# Altium PCB P1 - PCB.PcbDoc
Units mil, origin at the board's own origin, x right, y up, seen from the top; angles counter-clockwise.
Board outline 3000 x 3000 mil, 4 copper layers (TOP SIGNAL, POWER, GROUND, BOTTOM SIGNAL), stack 17.868 mil thick; 41 components, 31 nets, 163 pads, 33 vias.
Unrouted connection lines stored in the file: 1.
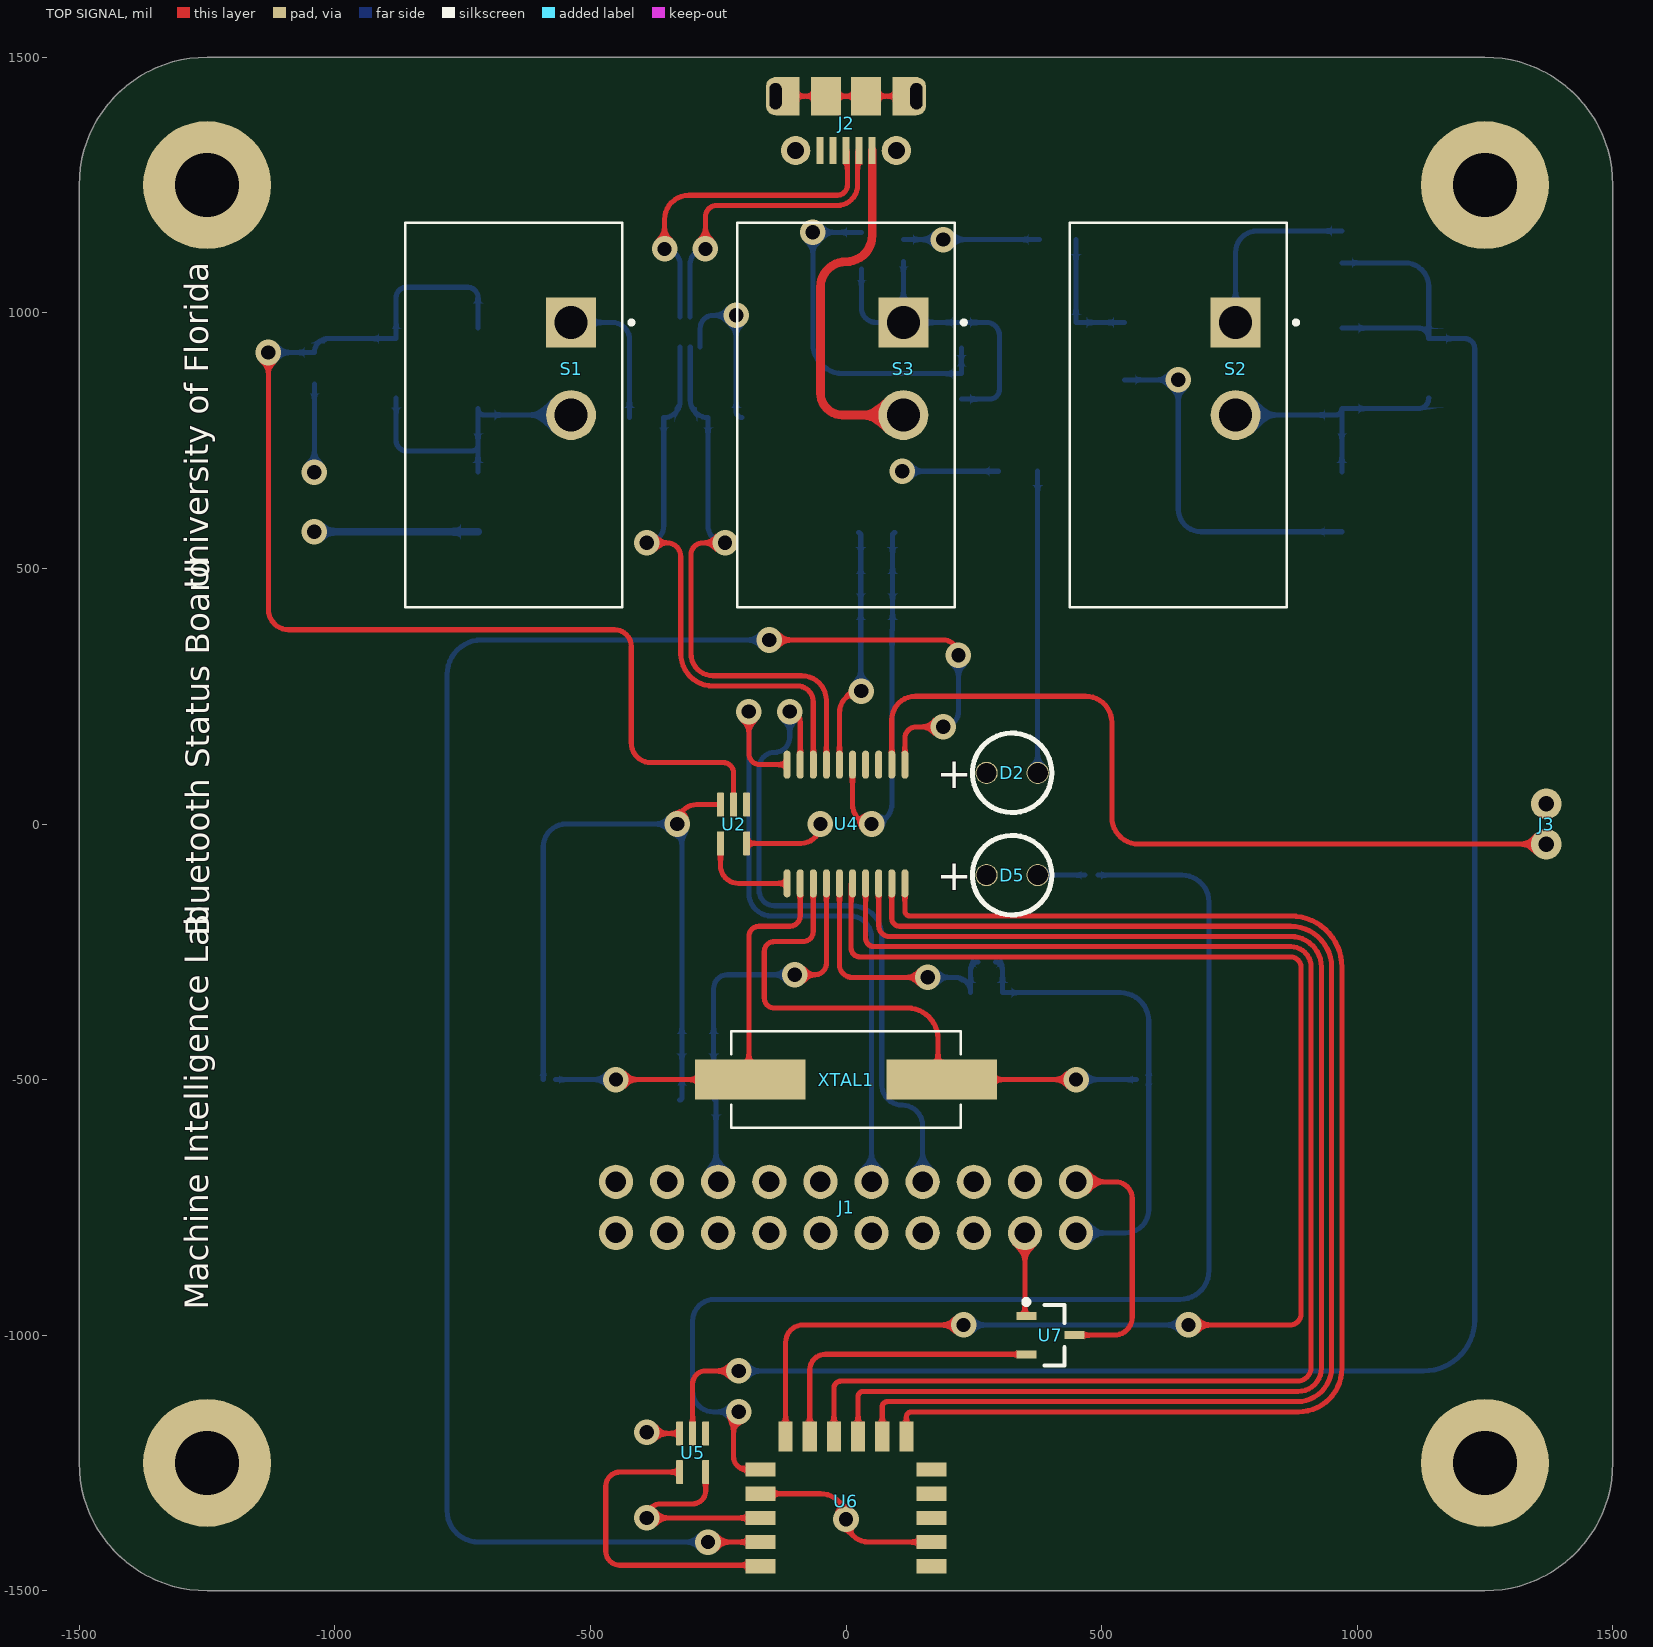
[diagram p0: TOP SIGNAL view]
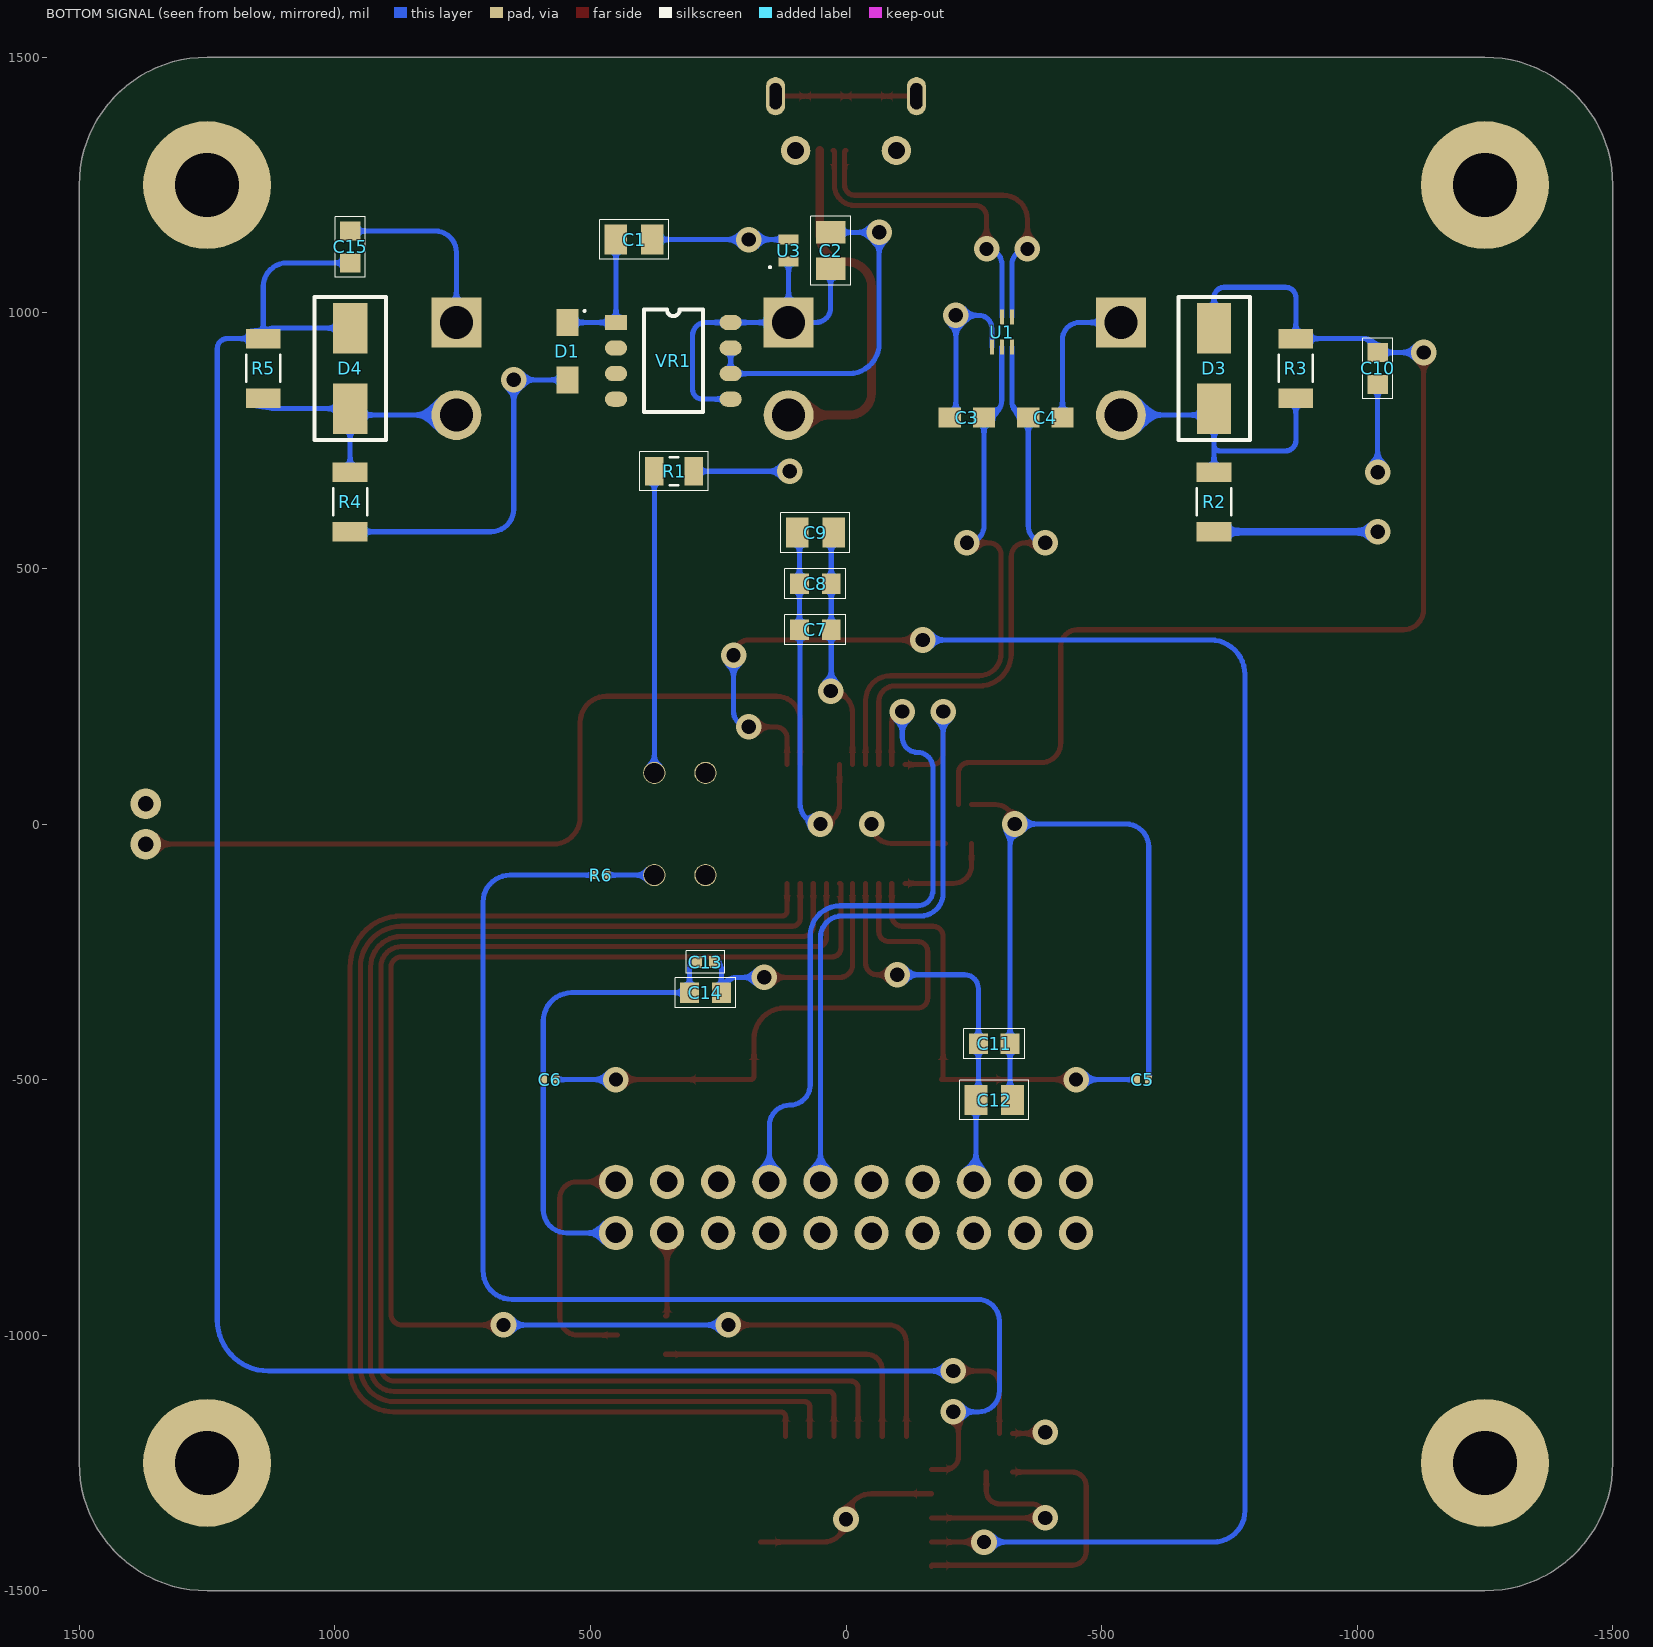
[diagram p1: BOTTOM SIGNAL view, seen from below]
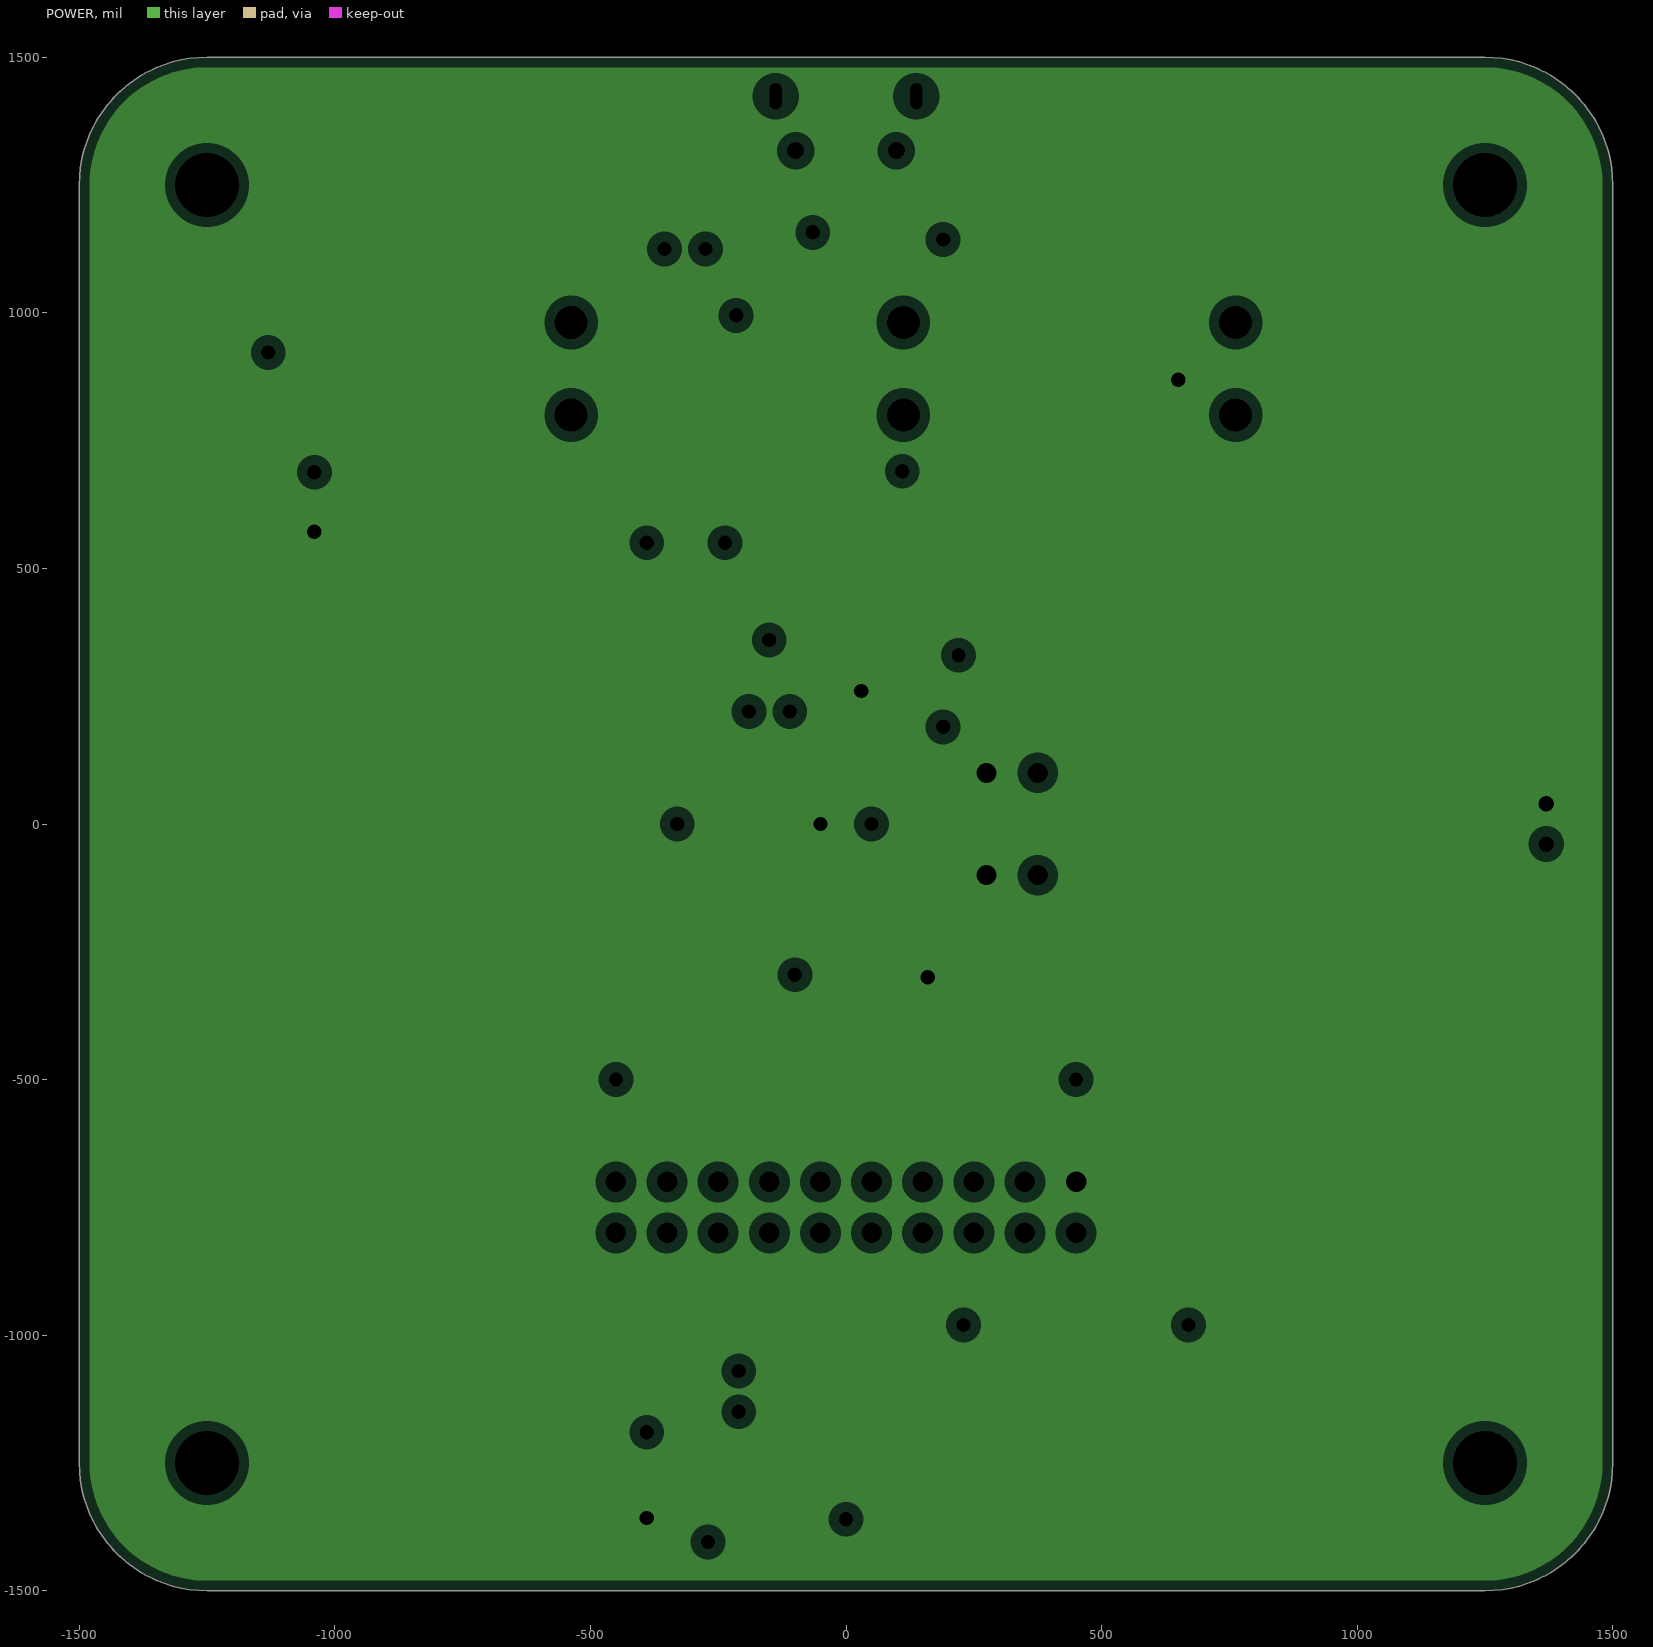
[diagram p2: POWER, clearances drawn from the general rule]
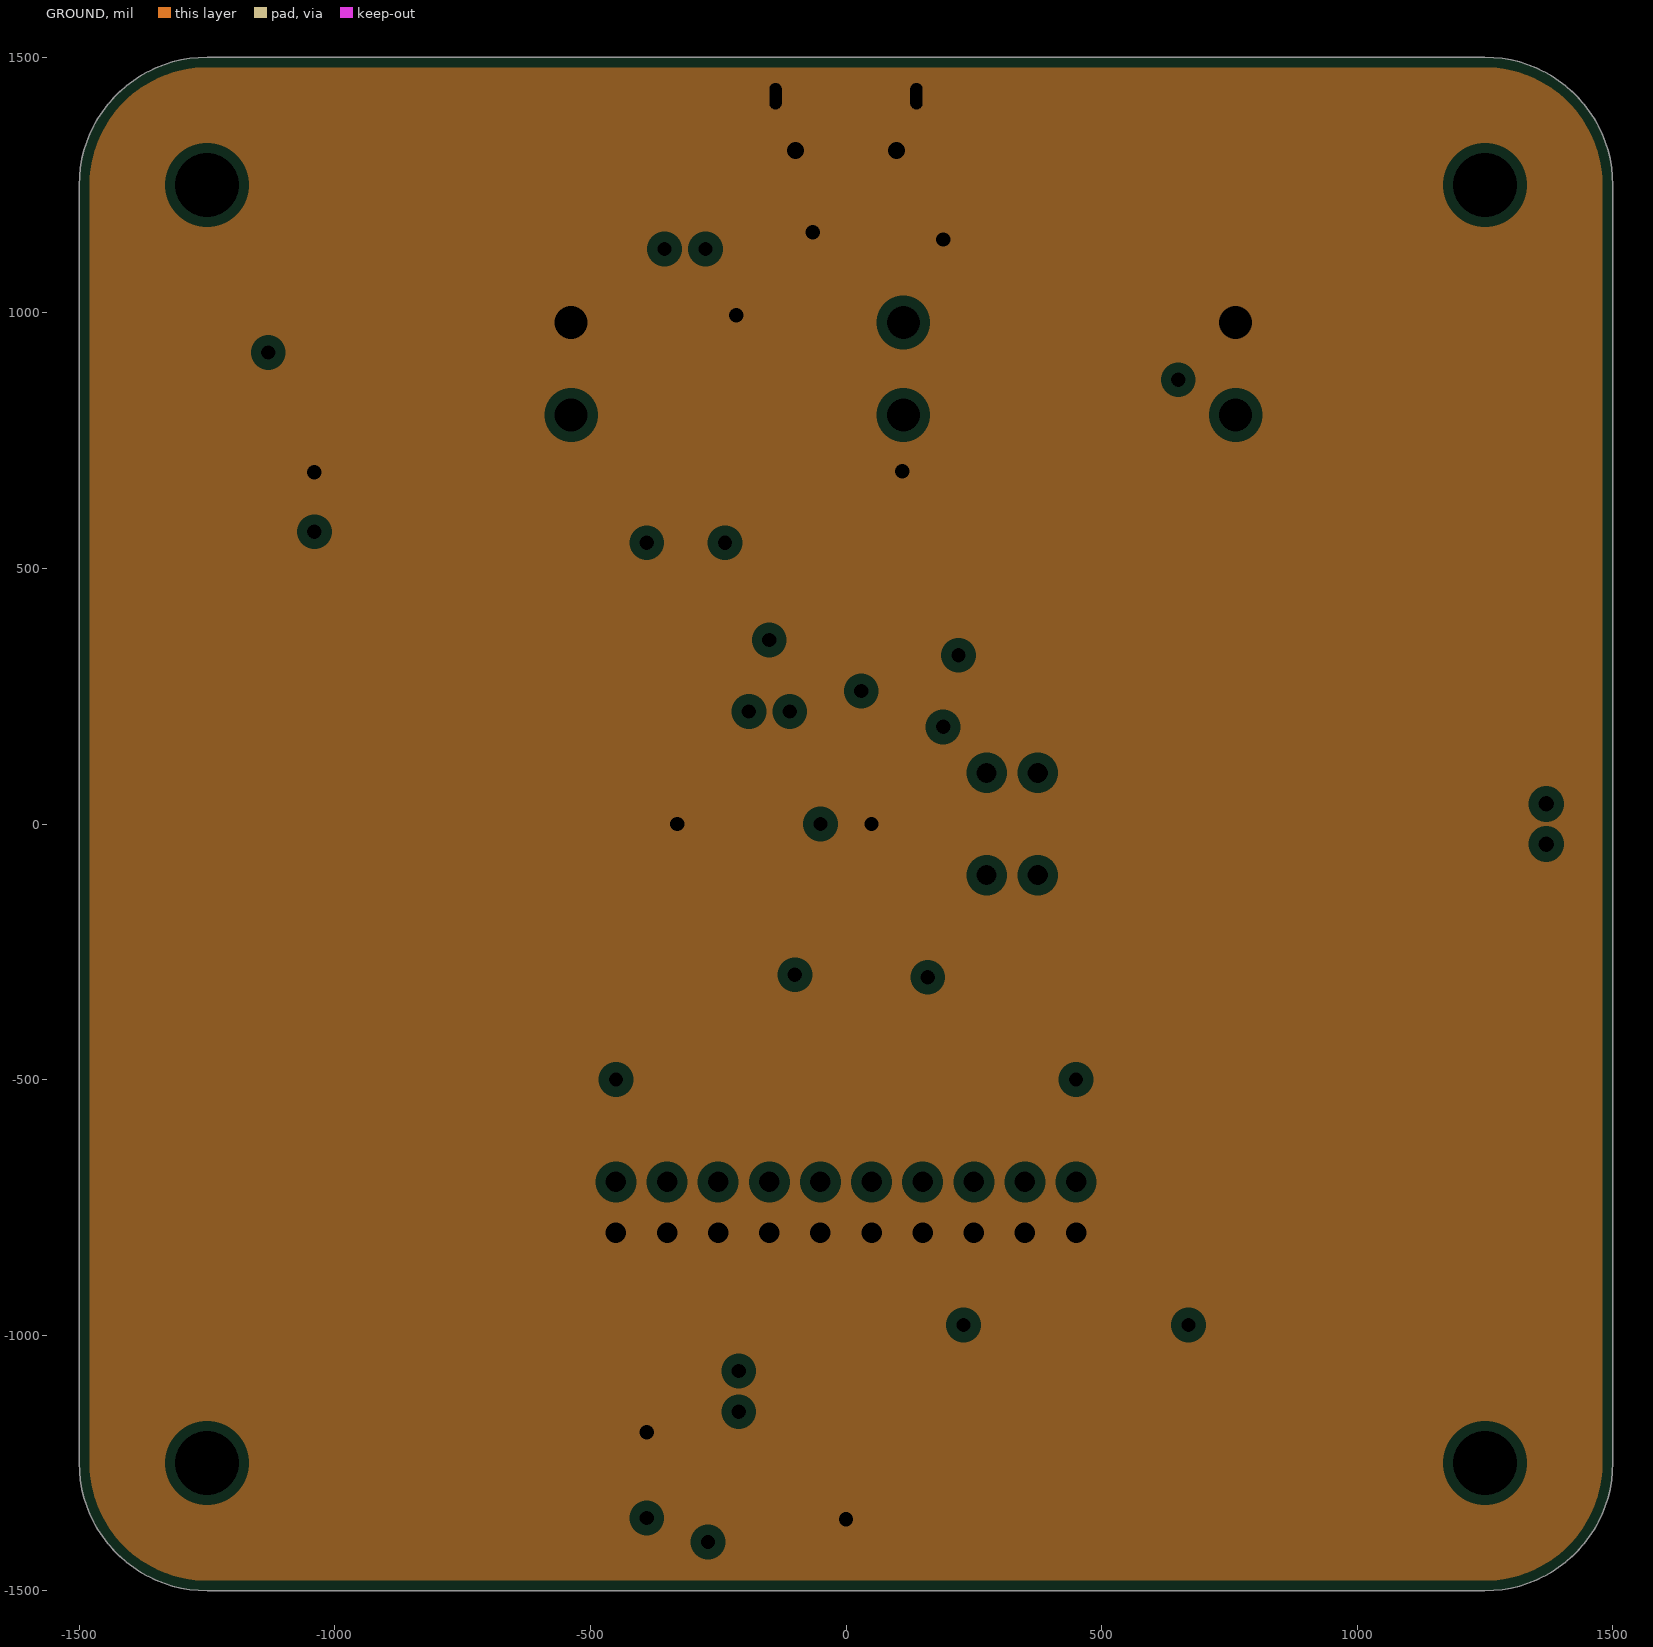
[diagram p3: GROUND, clearances drawn from the general rule]
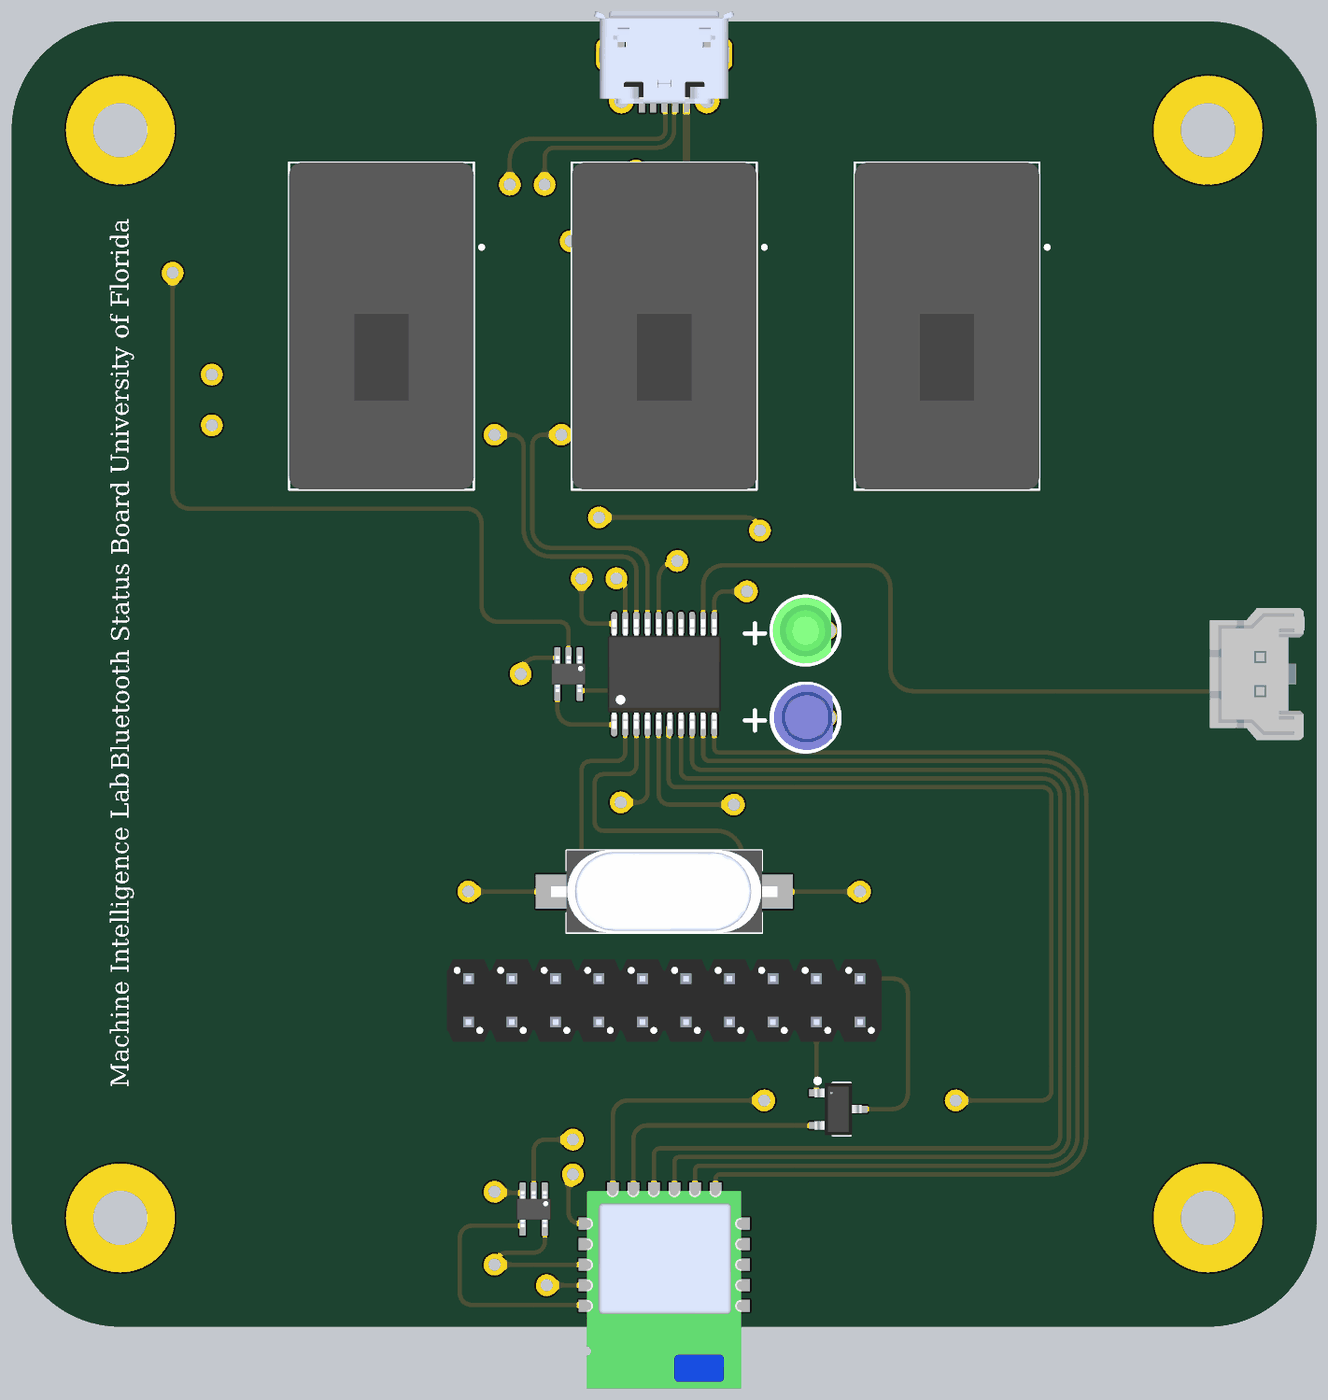
[diagram p4: 3D render of the assembled board from above, using the file's embedded part models]
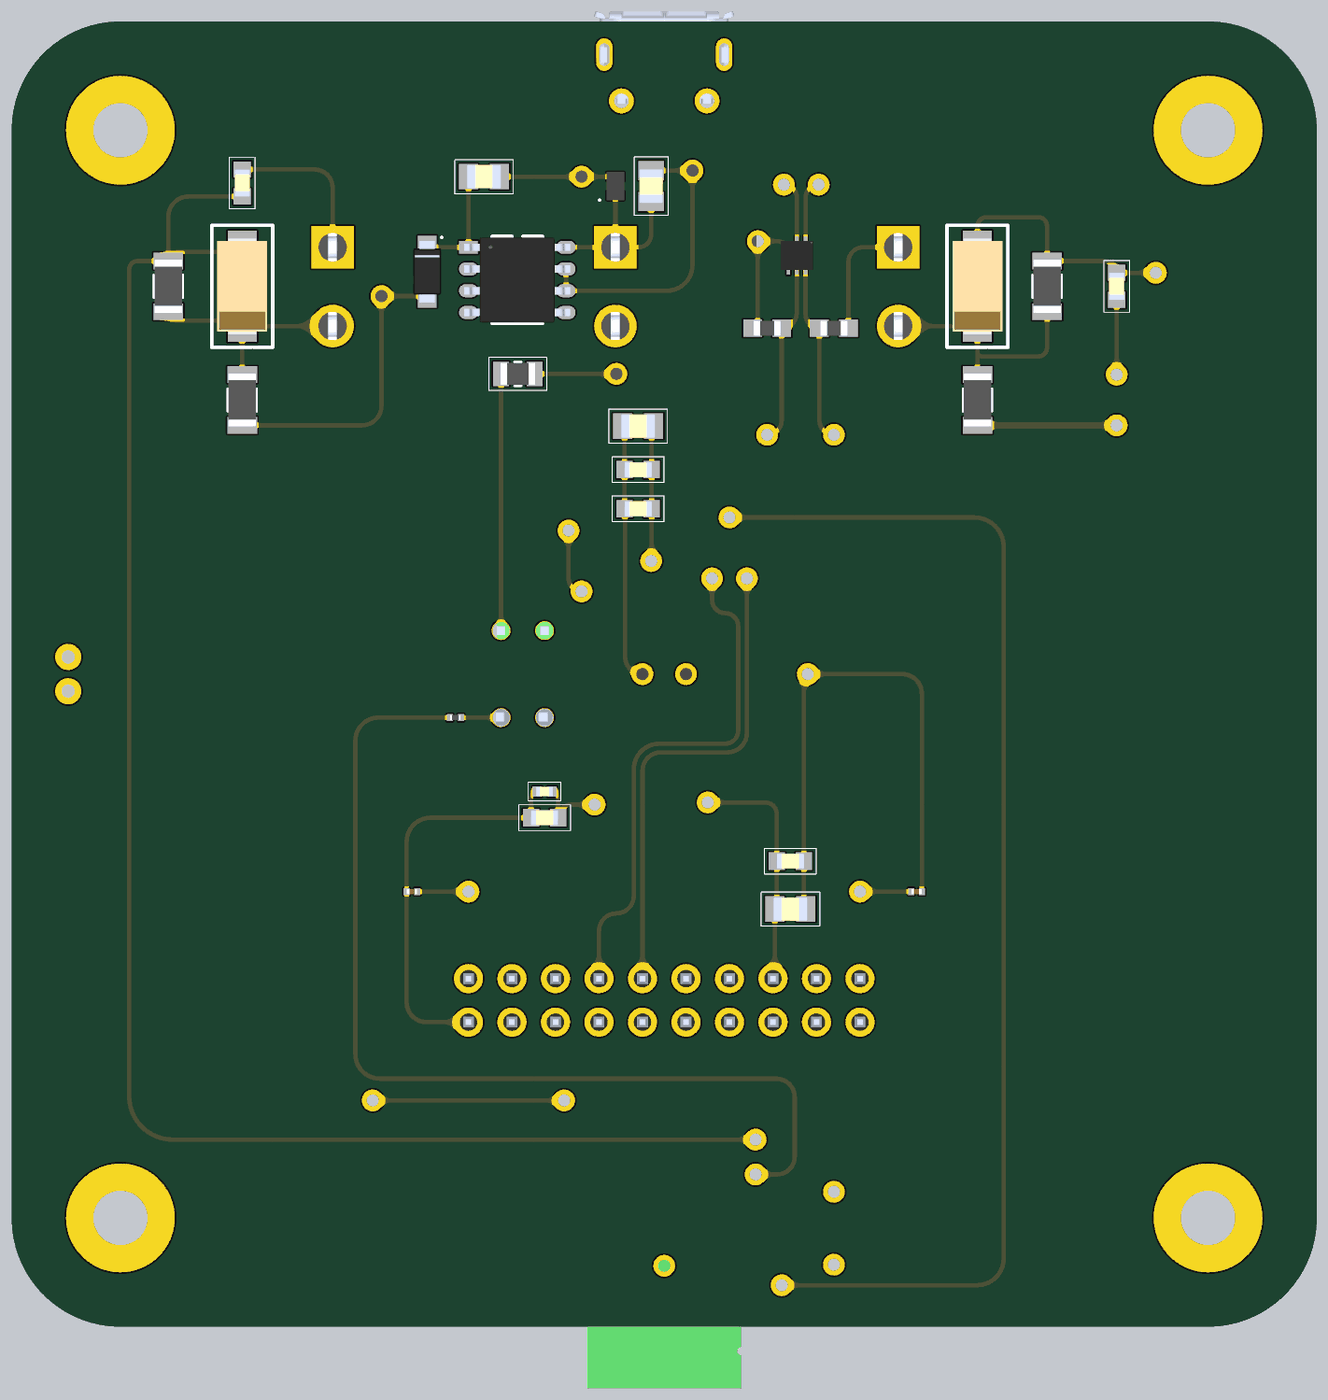
[diagram p5: 3D render of the assembled board from below, using the file's embedded part models]

## Layer stack, top to bottom
Top Solder: solder mask 1, SM-002, Dk 4
TOP SIGNAL: signal copper 1.378
Dielectric 2: prepreg 2.8, PP-006, Dk 4.1
POWER: plane copper 2.7559, net VCC
Dielectric 1: core 4, Core-009, Dk 4.5
GROUND: plane copper 2.7559, net GND
Dielectric 3: prepreg 2.8, PP-006, Dk 4.1
BOTTOM SIGNAL: signal copper 1.378
Bottom Solder: solder mask 1, SM-002, Dk 4

## Board outline
-1500,-1250 -1500,1250 cw(c-1250,1250) -1250,1500 1250,1500 cw(c1250,1250) 1500,1250 1500,-1250 cw(c1250,-1250) 1250,-1500 -1250,-1500 cw(c-1250,-1250)

## Design rules (kind name [scope] priority, off if disabled: settings)
Clearance [All] p1: gap=10 ignorepadtopadclearanceinfootprint=FALSE except(0: Arc-Hole Track-Hole SMDPad-Hole THPad-Hole Via-Hole Fill-Hole Poly-Hole Region-Hole Text-Hole; 5: Arc-Arc Arc-Track Track-Track)
DiffPairsRouting [All] p1: maxlimit=10 minlimit=5 mostfreqgap=10 toplayer_minwidth=10 toplayer_maxwidth=10 toplayer_prefwidth=10 bottomlayer_minwidth=10 bottomlayer_maxwidth=10 bottomlayer_prefwidth=10 maxuncoupledlength=700
PlaneClearance [All] p1: clearance=20
PlaneConnect [All] p1: planeconnectstyle=Relief reliefexpansion=20 reliefentries=4 reliefconductorwidth=10 reliefairgap=10
PolygonConnect [All] p1: connectstyle=Relief reliefconductorwidth=10 reliefentries=4 polygonreliefangle="90 Angle" airgapwidth=10
RoutingVias [All] p1: holewidth=28 width=50 viastyle="Through Hole" minholewidth=28 minwidth=50 maxholewidth=28 maxwidth=50
SolderMaskExpansion [All] p1: expansion=4 istentingtop=FALSE
Width [All] p1 off: maxlimit=10 minlimit=10 preferedwidth=10
27 further rules are at their usual default settings.

## Classes and differential pairs
component class "S5 - BLUETOOTH": D5 R6 U6 U7
component class "S4 - MICROCONTROLLER": C5 C6 C7 C8 C9 C11 C12 C13 C14 U4 XTAL1
component class "S3 - CONNECTORS": J1 J2 J3
component class "S2 - SWITCHES": C10 C15 D3 D4 R2 R3 R4 R5 S1 S2 U2 U5
component class "S1 - POWER": C1 C2 C3 C4 D1 D2 R1 S3 U1 U3 VR1
differential pair USB_D_UNPROT: +USB_D_UNPROT_P -USB_D_UNPROT_N
differential pair USB_D_PROT: +USB_D_PROT_P -USB_D_PROT_N

## Components (designator, comment, footprint, x,y, rotation, side; value= is the part's Value field where it differs from the comment)
C1 "4.7UF" TMK212AB7475KG-T 414.29,1143.31 r180 bottom
C2 "4.7UF" TMK212AB7475KG-T 30,1121.65 r90 bottom
C3 "CC0603JRNPO8BN470" CC0603JRNPO8BN470 -236.54,795 r0 bottom
C4 "CC0603JRNPO8BN470" CC0603JRNPO8BN470 -390,795 r180 bottom
C5 "10PF" C0603C0G1E100D030BA -580,-500 r180 bottom
C6 "10PF" C0603C0G1E100D030BA 580,-500 r0 bottom
C7 "1UF" CL10A105KQ8NNNC 60,380 r0 bottom
C8 "1UF" CL10A105KQ8NNNC 60,470 r0 bottom
C9 "4.7UF" TMK212AB7475KG-T 60,570 r0 bottom
C10 "1UF" CL10A105KQ8NNNC -1040,891.26 r270 bottom
C11 "1UF" CL10A105KQ8NNNC -290,-430 r180 bottom
C12 "4.7UF" TMK212AB7475KG-T -290,-540 r180 bottom
C13 "10000PF" C1005X7R1C103K050BA 275,-270 r0 bottom
C14 "1UF" CL10A105KQ8NNNC 275,-330 r0 bottom
C15 "1UF" CL10A105KQ8NNNC 970,1128.9 r90 bottom
D1 "NRVB120VLSFT1G" SODFL360X98-2N 545,925 r270 bottom
D2 "151031VS06000" 151031VS06000 275,100 r0 top
D3 "RS1K-13-F" RS1K-13-F -720,891.26 r90 bottom
D4 "RS1K-13-F" RS1K-13-F 970,891.26 r90 bottom
D5 "SLR343BC4T3F" SLR343BC4T3F 275,-100 r0 top
J1 "68691-420HLF" 68691-420HLF 0,-750 r180 top
J2 "1050170001" 1050170001 0,1410 r180 top
J3 "0353620250" 0353620250 1370,0 r90 top
R1 "Y162440R0000B9R" Y162440R0000B9R 336.46,690 r180 bottom
R2 "RT1206BRD0740KL" RT1206BRD0740KL -720,630 r270 bottom
R3 "RT1206BRD0740KL" RT1206BRD0740KL -880,891.26 r90 bottom
R4 "RT1206BRD0740KL" RT1206BRD0740KL 970,630 r270 bottom
R5 "RT1206BRD0740KL" RT1206BRD0740KL 1140,891.26 r90 bottom
R6 "CRCW0201330RFKED" CRCW0201330RFKED 480,-100 r0 bottom
S1 "L101011MS02Q" L101011MS02Q -650,800 r270 top
S2 "L101011MS02Q" L101011MS02Q 650,800 r270 top
S3 "L101011MS02Q" L101011MS02Q 0,800 r270 top
U1 "ECLAMP8052P.TCT" ECLAMP8052P.TCT -324.68,932.94 r0 bottom
U2 "SN74AHC1G14DCKRG4" SN74AHC1G14DCKRG4 -220,0 r270 top
U3 "UCLAMP0571P.TNT" UCLAMP0571P.TNT 112.2,1121.65 r90 bottom
U4 "STM32F042F6P6" STM32F042F6P6 0,0 r90 top
U5 "SN74AHC1G14DCKRG4" SN74AHC1G14DCKRG4 -300,-1230 r270 top
U6 "RN4871-V/RM140" RN4871-V/RM140 0,-1325 r180 top
U7 "STM809SWX6F" STM809SWX6F 400,-1000 r0 top
VR1 "BD33KA5WF-E2" BD33KA5WF-E2 450,981.1 r180 bottom
XTAL1 "ECS-80-20-5PX-TR" ECS-80-20-5PX-TR 0,-500 r0 top

## Footprints (in the part's own frame and the unit in brackets; to place one, negate y for a bottom-side part, rotate by r counter-clockwise, add the part's x,y. Pads: shape width x height; smd on the part's side, far side on the other; paste and mask are expansions set on the pad)
68691-420HLF [mm] "CONN HEADER VERT 20POS 2.54MM"
  round 1.7 hole 1.02: 1(-11.43,-1.27) 2(-11.43,1.27) 3(-8.89,-1.27) 4(-8.89,1.27) 5(-6.35,-1.27) 6(-6.35,1.27) 7(-3.81,-1.27) 8(-3.81,1.27) 9(-1.27,-1.27) 10(-1.27,1.27) 11(1.27,-1.27) 12(1.27,1.27) 13(3.81,-1.27) 14(3.81,1.27) 15(6.35,-1.27) 16(6.35,1.27) 17(8.89,-1.27) 18(8.89,1.27) 19(11.43,-1.27) 20(11.43,1.27)
  body extent -12.7,-2.41 12.7,2.41, height 9.03
151031VS06000 [mm] "LED GREEN DIFFUSED 3MM ROUND T/H"
  round 1.1 hole 1: 1(0,0) 2(2.54,0)
  silkscreen extent -0.7,-1.97 3.24,1.97, body extent -0.65,-1.92 2.79,1.92, height 5.3
0353620250 [mil] "CONN HEADER VERT 2POS 2MM"
  round 60 hole 30: 1(-39.37,0) 2(39.37,0)
  body extent -152,-102 152,116, height 341
1050170001 [mm] "CONN RCPT USB2.0 MICRO B SMD R/A"
  rect 0.35x1.35 smd: 1(-1.3,2.35) 2(-0.65,2.35) 3(0,2.35) 4(0.65,2.35) 5(1.3,2.35)
  oval 0.95x1.9 hole 0.6 slot 1.3 at 90 deg: 6(-3.5,-0.35) 6(3.5,-0.35)
  rect 1.2x1.9 smd: 6(-2.9,-0.35) 6(2.9,-0.35)
  round 1.45 hole 0.85: 6(-2.5,2.35) 6(2.5,2.35)
  rect 1.5x1.9 smd: 6(-1,-0.35) 6(1,-0.35)
  body extent -4.1,-2.88 4.1,2.52, height 2.78
BD33KA5WF-E2 [mm] "IC REG LINEAR 3.3V 500MA 8SOP"
  rect 1.1x0.76 smd: 1(0,0)
  oval 1.1x0.76 smd: 2(0,-1.27) 3(0,-2.54) 4(0,-3.81) 5(5.7,-3.81) 6(5.7,-2.54) 7(5.7,-1.27) 8(5.7,0)
  silkscreen extent 1.38,-4.45 4.32,0.63, body extent -0.25,-4.41 5.94,0.6, height 1.5
C0603C0G1E100D030BA [mm] "CAP CER 10PF 25V C0G 0201"
  rect 0.35x0.4 smd: 1(-0.31,0) 2(0.31,0)
  body extent -0.3,-0.15 0.3,0.15, height 0.3
C1005X7R1C103K050BA [mm] "CAP CER 10000PF 16V X7R 0402"
  rect 0.53x0.6 smd: 1(-0.437,0) 2(0.437,0)
  silkscreen extent -0.95,-0.55 0.95,0.55, body extent -0.5,-0.27 0.5,0.28, height 0.49
CC0603JRNPO8BN470 [mm] "CAP CER 47PF 25V NPO 0603"
  rect 1.1x1 smd: 1(-0.85,0) 2(0.85,0)
  body extent -0.8,-0.45 0.8,0.45, height 0.79
CL10A105KQ8NNNC [mm] "CAP CER 1UF 6.3V X5R 0603"
  rect 0.94x1.02 smd: 1(-0.79,0) 2(0.79,0)
  silkscreen extent -1.51,-0.75 1.51,0.75, body extent -0.8,-0.45 0.8,0.45, height 0.81
CRCW0201330RFKED [mm] "RES SMD 330 OHM 1% 1/20W 0201"
  rect 0.35x0.4 smd: 1(-0.325,0) 2(0.325,0)
  body extent -0.3,-0.15 0.3,0.15, height 0.28
ECLAMP8052P.TCT [mm] "CMC 2LN SMD ESD AEC-Q100"
  rect 0.2x0.75 smd: 1(0,-1.5) 2(0.5,-1.5) 3(1,0) 4(0.5,0) 5(0,0)
  body extent -0.45,-1.6 1.45,0.1, height 0.55
ECS-80-20-5PX-TR [mm] "CRYSTAL 8.0000MHZ 20PF SMD"
  rect 5.5x2 smd: 1(-4.75,0) 2(4.75,0)
  silkscreen extent -5.7,-2.4 5.7,2.4, body extent -6.6,-2.39 6.6,2.41, height 4.3
L101011MS02Q [mm] "SWITCH SLIDE SPST 4A 125V"
  rect 2.48x2.48 hole 1.65: 1(-4.6,2.85)
  round 2.48 hole 1.65: 2(0,2.85)
  silkscreen extent -9.55,-5.4 9.55,5.95, body extent -9.55,-5.4 9.55,5.4, height 14.17
RN4871-V/RM140 [mm] "RX TXRX MODULE BLE CHIP SMD"
  rect 1.5x0.7 smd: 1(-4.25,3.225) 2(-4.25,2.025) 3(-4.25,0.825) 4(-4.25,-0.375) 5(-4.25,-1.575) 12(4.25,-1.575) 13(4.25,-0.375) 14(4.25,0.825) 15(4.25,2.025) 16(4.25,3.225)
  rect 0.7x1.5 smd: 6(-3,-3.225) 7(-1.8,-3.225) 8(-0.6,-3.225) 9(0.6,-3.225) 10(1.8,-3.225) 11(3,-3.225)
  body extent -4.5,-3.47 4.52,8.03, height 2.11
RS1K-13-F [mm] "DIODE GEN PURP 800V 1A SMA"
  rect 2.5x1.7 smd: 1(-2,0) 2(2,0)
  silkscreen extent -3.56,-1.78 3.56,1.78, body extent -2.79,-1.46 2.8,1.46, height 2.35
RT1206BRD0740KL [mm] "RES SMD 40K OHM 0.1% 1/4W 1206"
  rect 0.97x1.73 smd: 1(-1.48,0) 2(1.48,0)
  silkscreen extent -0.67,-0.85 0.67,0.85, body extent -1.55,-0.8 1.55,0.8, height 0.65
SLR343BC4T3F [mm] "LED BLUE CLEAR T-1 T/H"
  round 1.1 hole 1: 1(0,0) 2(2.54,0)
  silkscreen extent -0.7,-1.97 3.24,1.97, body extent -0.58,-1.9 2.87,1.95, height 5.4
SN74AHC1G14DCKRG4 [mm] "IC INVERT SCHMITT 1CH 1IN SC70"
  rrect25% 1.19x0.35 smd: 1(-0.96,0.65) 2(-0.96,0) 3(-0.96,-0.65) 4(0.96,-0.65) 5(0.96,0.65)
  body extent -1.05,-1 1.05,1, height 1.1
SODFL360X98-2N [mm] "DIODE SCHOTTKY 20V 1A SOD123"
  rect 1.35x1.1 smd: 1(1.425,0) 2(-1.425,0)
  silkscreen extent -2.05,0.8 -1.95,0.9, body extent -1.8,-0.82 1.8,0.83, height 0.95
STM32F042F6P6 [mm] "IC MCU 32BIT 32KB FLASH 20TSSOP"
  oval 1.4x0.35 smd: 1(-2.95,2.925) 2(-2.95,2.275) 3(-2.95,1.625) 4(-2.95,0.975) 5(-2.95,0.325) 6(-2.95,-0.325) 7(-2.95,-0.975) 8(-2.95,-1.625) 9(-2.95,-2.275) 10(-2.95,-2.925) 11(2.95,-2.925) 12(2.95,-2.275) 13(2.95,-1.625) 14(2.95,-0.975) 15(2.95,-0.325) 16(2.95,0.325) 17(2.95,0.975) 18(2.95,1.625) 19(2.95,2.275) 20(2.95,2.925)
  body extent -3.2,-3.3 3.2,3.3, height 1.2
STM809SWX6F [mm] "IC SUPERVISOR 1 CHANNEL SOT23-3"
  rect 1x0.4 smd: 1(-1.2,0.95) 2(-1.2,-0.95) 3(1.2,0)
  silkscreen extent -1.32,-1.5 0.7,1.77, body extent -1.37,-1.52 1.37,1.52, height 1.4
TMK212AB7475KG-T [mm] "CAP CER 4.7UF 25V X7R 0805"
  rect 1.12x1.48 smd: 1(-0.907,0) 2(0.907,0)
  silkscreen extent -1.72,-0.99 1.72,0.99, body extent -1,-0.7 1,0.7, height 1.24
UCLAMP0571P.TNT [mm] "TVS DIODE 5V 15V SGP1610N2"
  rect 0.5x1 smd: 1(-0.55,0) 2(0.55,0)
  silkscreen extent -0.87,0.88 -0.78,0.97, body extent -0.82,-0.53 0.82,0.53, height 0.55
Y162440R0000B9R [mm] "RES SMD 40 OHM 0.1% 1/5W 0805"
  rect 0.93x1.42 smd: 1(-0.979,0) 2(0.979,0)
  silkscreen extent -1.69,-0.96 1.69,0.96, body extent -1.02,-0.64 1.01,0.63, height 0.64

## Part data
C1 C2 C9 C12: library part TMK212AB7475KG-T, "CAP CER 4.7UF 25V X7R 0805", Capacitance="4.7 µF", Operating Temperature="-55°C ~ 125°C", Package / Case="0805 (2012 Metric)", Supplier Part Number 1=587-2990-1-ND, Temperature Coefficient=X7R, Tolerance=±10%, Voltage - Rated=25V, Applications="SMPS Filtering", ComponentLink1Description=Datasheet, ComponentLink1URL=https://www.yuden.co.jp/productdata/catalog/mlcc06_e.pdf, Mounting Type="Surface Mount, MLCC", Size / Dimension="0.079\" L x 0.049\" W (2.00mm x 1.25mm)", Supplier 1=Digi-Key, Thickness (Max)="0.053\" (1.35mm)"
C3 C4: "CAP CER 47PF 25V NPO 0603", Capacitance="47 pF", Operating Temperature="-55°C ~ 125°C", Package / Case="0603 (1608 Metric)", Supplier Part Number 1=311-3955-1-ND, Temperature Coefficient="C0G, NP0", Tolerance=±5%, Voltage - Rated=25V, Applications="General Purpose", ComponentLink1Description=Datasheet, ComponentLink1URL=https://www.yageo.com/upload/media/product/productsearch/datasheet/mlcc/UPY-GP_NP0_16V-to-50V_18.pdf, Mounting Type="Surface Mount, MLCC", Size / Dimension="0.063\" L x 0.031\" W (1.60mm x 0.80mm)", Supplier 1=Digi-Key, Thickness (Max)="0.035\" (0.90mm)"
C5 C6: library part C0603C0G1E100D030BA, "CAP CER 10PF 25V C0G 0201", Capacitance="10 pF", Operating Temperature="-55°C ~ 125°C", Package / Case="0201 (0603 Metric)", Supplier Part Number 1=445-4651-1-ND, Temperature Coefficient="C0G, NP0", Tolerance=±0.5pF, Voltage - Rated=25V, Applications="General Purpose", ComponentLink1Description=Datasheet, ComponentLink1URL=https://product.tdk.com/en/system/files?file=dam/doc/product/capacitor/ceramic/mlcc/catalog/mlcc_commercial_general_en.pdf, Features="Low ESL", Mounting Type="Surface Mount, MLCC", Size / Dimension="0.024\" L x 0.012\" W (0.60mm x 0.30mm)", Supplier 1=Digi-Key, Thickness (Max)="0.013\" (0.33mm)"
C7 C8 C10 C11 C14 C15: library part CL10A105KQ8NNNC, "CAP CER 1UF 6.3V X5R 0603", Capacitance="1 µF", Operating Temperature="-55°C ~ 85°C", Package / Case="0603 (1608 Metric)", Supplier Part Number 1=1276-1036-1-ND, Temperature Coefficient=X5R, Tolerance=±10%, Voltage - Rated=6.3V, Applications="General Purpose", ComponentLink1Description=Datasheet, ComponentLink1URL=https://www.samsungsem.com/resources/file/global/support/product_catalog/MLCC.pdf, Mounting Type="Surface Mount, MLCC", Size / Dimension="0.063\" L x 0.031\" W (1.60mm x 0.80mm)", Supplier 1=Digi-Key, Thickness (Max)="0.035\" (0.90mm)"
C13: library part C1005X7R1C103K050BA, "CAP CER 10000PF 16V X7R 0402", Capacitance="10000 pF", Operating Temperature="-55°C ~ 125°C", Package / Case="0402 (1005 Metric)", Supplier Part Number 1=445-1262-1-ND, Temperature Coefficient=X7R, Tolerance=±10%, Voltage - Rated=16V, Applications="General Purpose", ComponentLink1Description=Datasheet, ComponentLink1URL=https://product.tdk.com/en/system/files?file=dam/doc/product/capacitor/ceramic/mlcc/catalog/mlcc_commercial_general_en.pdf, Features="Low ESL", Mounting Type="Surface Mount, MLCC", Size / Dimension="0.039\" L x 0.020\" W (1.00mm x 0.50mm)", Supplier 1=Digi-Key, Thickness (Max)="0.022\" (0.55mm)"
D1: "DIODE SCHOTTKY 20V 1A SOD123", Current - Average Rectified (Io)=1A, Current - Reverse Leakage @ Vr="15 mA @ 20 V", Operating Temperature - Junction="-65°C ~ 125°C", Package / Case=SOD-123F, Supplier Device Package=SOD-123FL, Supplier Part Number 1=3116510, Voltage - DC Reverse (Vr) (Max)="20 V", Voltage - Forward (Vf) (Max) @ If="300 mV @ 1 A", Diode Type=Schottky, Mounting Type="Surface Mount", Speed="Fast Recovery =< 500ns, > 200mA (Io)", Supplier 1="Future Electronics"
D2: "LED GREEN DIFFUSED 3MM ROUND T/H", Color=Green, Current - Test=20mA, Millicandela Rating=30mcd, Package / Case=Radial, Supplier Device Package="3mm Round", Supplier Part Number 1=732-5008-ND, Voltage - Forward (Vf) (Typ)=2.2V, Configuration=Standard, Height (Max)=5.55mm, Lens Color=Green, Lens Size="3.00mm Dia", Lens Style="Round with Domed Top", Lens Transparency=Diffused, Mounting Type="Through Hole", Supplier 1=Digi-Key, Viewing Angle=60°, Wavelength - Dominant=568nm, Wavelength - Peak=560nm
D3 D4: "DIODE GEN PURP 800V 1A SMA", Capacitance @ Vr, F="15pF @ 4V, 1MHz", Current - Average Rectified (Io)=1A, Current - Reverse Leakage @ Vr="5 µA @ 800 V", Operating Temperature - Junction="-65°C ~ 150°C", Package / Case="DO-214AC, SMA", Supplier Device Package=SMA, Voltage - DC Reverse (Vr) (Max)="800 V", Voltage - Forward (Vf) (Max) @ If="1.3 V @ 1 A", ComponentLink1Description=Datasheet, ComponentLink1URL=https://www.diodes.com/assets/Datasheets/ds15002.pdf, Diode Type=Standard, Mounting Type="Surface Mount", Reverse Recovery Time (trr)="500 ns", Speed="Fast Recovery =< 500ns, > 200mA (Io)"
D5: "LED BLUE CLEAR T-1 T/H", Color=Blue, Current - Test=20mA, Lens Color=Colorless, Millicandela Rating=470mcd, Package / Case=Radial, Supplier Device Package=T-1, Supplier Part Number 1=846-1137-ND, Voltage - Forward (Vf) (Typ)=3.2V, Configuration=Standard, Height (Max)=5.60mm, Lens Size="3.10mm Dia", Lens Style="Round with Domed Top", Lens Transparency=Clear, Mounting Type="Through Hole", Supplier 1=Digi-Key, Viewing Angle=40°, Wavelength - Dominant=470nm
J1: "CONN HEADER VERT 20POS 2.54MM", Insulation Color=Black, Material Flammability Rating="UL94 V-0", Supplier Part Number 1=609-6378-ND, Connector Type=Header, Contact Finish - Mating=Tin, Contact Finish - Post=Tin, Contact Finish Thickness - Mating="100.0µin (2.54µm)", Contact Length - Mating="0.318\" (8.08mm)", Contact Length - Post="0.120\" (3.05mm)", Contact Material="Phosphor Bronze", Contact Shape=Square, Contact Type="Male Pin", Fastening Type=Push-Pull, Insulation Height="0.100\" (2.54mm)", Mounting Type="Through Hole", Number of Positions=20, Number of Positions Loaded=All, Number of Rows=2, Overall Contact Length="0.538\" (13.67mm)", Pitch - Mating="0.100\" (2.54mm)", Row Spacing - Mating="0.100\" (2.54mm)", Shrouding=Unshrouded, Style="Board to Board", Supplier 1=Digi-Key, Termination=Solder
J2: "CONN RCPT USB2.0 MICRO B SMD R/A", Current Rating (Amps)="1A, 1.8A", Insulation Color=Black, Material Flammability Rating="UL94 V-0", Operating Temperature="-30°C ~ 85°C", Supplier Part Number 1=WM1399CT-ND, Voltage - Rated=30VAC, Connector Type="USB - micro B", Contact Finish=Gold, Features="Pick and Place, Solder Retention", Gender=Receptacle, Mating Cycles=10000, Mounting Feature=Horizontal, Mounting Type="Surface Mount, Right Angle; Through Hole", Number of Contacts=5, Number of Ports=1, Shell/Shielding Material="Steel, Stainless", Shielding=Shielded, Specifications="USB 2.0", Supplier 1=Digi-Key, Termination=Solder
J3: "CONN HEADER VERT 2POS 2MM", Insulation Color=Natural, Material Flammability Rating="UL94 V-0", Operating Temperature="-40°C ~ 105°C", Voltage Rating=125V, Applications="Automotive, General Purpose", ComponentLink1Description=Datasheet, ComponentLink1URL=https://media.digikey.com/pdf/Data%20Sheets/Molex%20PDFs/PS-35507-003.pdf, Connector Type=Header, Contact Finish - Mating=Tin, Contact Finish - Post=Tin, Contact Finish Thickness - Mating="39.4µin (1.00µm)", Contact Finish Thickness - Post="39.4µin (1.00µm)", Contact Length - Mating="0.145\" (3.70mm)", Contact Length - Post="0.130\" (3.30mm)", Contact Material=Brass, Contact Shape=Square, Contact Type="Male Pin", Fastening Type="Locking Ramp", Insulation Height="0.335\" (8.51mm)", Insulation Material="Polyamide (PA), Nylon", Mated Stacking Heights=8.5mm, Mounting Type="Through Hole", Number of Positions=2, Number of Positions Loaded=All, Number of Rows=1, Pitch - Mating="0.079\" (2.00mm)", Shrouding="Shrouded - 4 Wall", Style="Board to Cable/Wire", Termination=Solder
R1: "RES SMD 40 OHM 0.1% 1/5W 0805", Operating Temperature="-55°C ~ 150°C", Package / Case="0805 (2012 Metric)", Power (Watts)="0.2W, 1/5W", Resistance="40 Ohms", Supplier Device Package=0805, Temperature Coefficient=±0.2ppm/°C, Tolerance=±0.1%, ComponentLink1Description=Datasheet, ComponentLink1URL=http://www.vishaypg.com/docs/63060/VSMP.pdf, Composition="Metal Foil", Features="Moisture Resistant, Non-Inductive", Height - Seated (Max)="0.025\" (0.64mm)", Number of Terminations=2, Size / Dimension="0.080\" L x 0.050\" W (2.03mm x 1.27mm)"
R2 R3 R4 R5: "RES SMD 40K OHM 0.1% 1/4W 1206", Operating Temperature="-55°C ~ 155°C", Package / Case="1206 (3216 Metric)", Power (Watts)="0.25W, 1/4W", Resistance="40 kOhms", Supplier Device Package=1206, Supplier Part Number 1=13-RT1206BRD0740KLCT-ND, Temperature Coefficient=±25ppm/°C, Tolerance=±0.1%, ComponentLink1Description=Datasheet, ComponentLink1URL=https://www.yageo.com/upload/media/product/productsearch/datasheet/rchip/PYu-RT_1-to-0.01_RoHS_L_12.pdf, Composition="Thin Film", Height - Seated (Max)="0.026\" (0.65mm)", Number of Terminations=2, Size / Dimension="0.122\" L x 0.063\" W (3.10mm x 1.60mm)", Supplier 1=Digi-Key
R6: "RES SMD 330 OHM 1% 1/20W 0201", Operating Temperature="-55°C ~ 155°C", Package / Case="0201 (0603 Metric)", Power (Watts)="0.05W, 1/20W", Resistance="330 Ohms", Supplier Device Package=0201, Temperature Coefficient=±100ppm/°C, Tolerance=±1%, ComponentLink1Description=Datasheet, ComponentLink1URL=https://www.vishay.com/docs/20052/crcw0201e3.pdf, Composition="Thick Film", Height - Seated (Max)="0.011\" (0.28mm)", Number of Terminations=2, Size / Dimension="0.024\" L x 0.012\" W (0.60mm x 0.30mm)"
S1 S2 S3: "SWITCH SLIDE SPST 4A 125V", Current Rating (Amps)="4A (AC/DC)", Operating Temperature="-30°C ~ 65°C", Supplier Part Number 1=CKC5106-ND, Voltage Rating - AC="125 V", Voltage Rating - DC="28 V", Actuator Length=5.08mm, Actuator Material="Polyamide (PA66), Nylon 6/6", Actuator Type=Standard, Circuit=SPST, ComponentLink1Description=Datasheet, ComponentLink1URL=https://www.ckswitches.com/media/1423/l.pdf, Contact Finish=Silver, Contact Material=Copper, Contact Timing="Not Specified", Electrical Life="10,000 Cycles", Mounting Type="Through Hole", Supplier 1=Digi-Key, Switch Function=On-Off, Switch Travel=3.81mm, Termination Style="PC Pin"
U1: "CMC 2LN SMD ESD AEC-Q100", DC Resistance (DCR) (Max)=1.8Ohm, Operating Temperature="-40°C ~ 125°C", Package / Case=5-UFDFN, Ratings=AEC-Q100, Supplier Part Number 1=ECLAMP8052P.TCTCT-ND, ComponentLink1Description=Datasheet, ComponentLink1URL=https://semtech.my.salesforce.com/sfc/p/#E0000000JelG/a/44000000MClt/x4_O.M8f1_5l6CovuR7Nj9RxqDFB_sAgVeqN73g7pps, Features=ESD, Height (Max)="0.024\" (0.60mm)", Mounting Type="Surface Mount", Number of Lines=2, Size / Dimension="0.075\" L x 0.067\" W (1.90mm x 1.70mm)", Supplier 1=Digi-Key
U2 U5: "IC INVERT SCHMITT 1CH 1IN SC70", Current - Output High, Low="8mA, 8mA", Current - Quiescent (Max)="1 µA", Operating Temperature="-40°C ~ 125°C", Package / Case="5-TSSOP, SC-70-5, SOT-353", Supplier Device Package=SC-70-5, Voltage - Supply="2V ~ 5.5V", Features="Schmitt Trigger", Logic Level - High="2.2V ~ 3.85V", Logic Level - Low="0.9V ~ 1.65V", Logic Type=Inverter, Max Propagation Delay @ V, Max CL="10.6ns @ 5V, 50pF", Mounting Type="Surface Mount", Number of Circuits=1, Number of Inputs=1
U3: "TVS DIODE 5V 15V SGP1610N2", Capacitance @ Frequency="675pF @ 1MHz", Current - Peak Pulse (10/1000µs)=80A, Operating Temperature="-40°C ~ 125°C (TJ)", Package / Case=2-UDFN, Power Line Protection=No, Supplier Device Package=SGP1610N2, Supplier Part Number 1=UCLAMP0571P.TNTCT-ND, Voltage - Breakdown (Min)=6V, Voltage - Clamping (Max) @ Ipp=15V, Voltage - Reverse Standoff (Typ)="5V (Max)", Applications=Automotive, ComponentLink1Description=Datasheet, ComponentLink1URL=https://semtech.my.salesforce.com/sfc/p/#E0000000JelG/a/440000001MYJ/IUMjL3gSEdL0j_8aQaHuKPXW_0n5uJ8aCJSLGDAHDuk, Mounting Type="Surface Mount", Supplier 1=Digi-Key, TYPE=Zener, Unidirectional Channels=1
U4: "IC MCU 32BIT 32KB FLASH 20TSSOP", Operating Temperature="-40°C ~ 85°C (TA)", Package / Case="20-TSSOP (0.173\", 4.40mm Width)", Supplier Device Package=20-TSSOP, Supplier Part Number 1=42Y1015, Voltage - Supply (Vcc/Vdd)="1.65V ~ 3.6V", ComponentLink1Description=Datasheet, ComponentLink1URL=https://www.st.com/content/ccc/resource/technical/document/datasheet/52/ad/d0/80/e6/be/40/ad/DM00105814.pdf/files/DM00105814.pdf/jcr:content/translations/en.DM00105814.pdf, Connectivity="CANbus, HDMI-CEC, I²C, IrDA, LINbus, SPI, UART/USART, USB", Core Processor="ARM® Cortex®-M0", Core Size=32-Bit, Data Converters="A/D 12x12b", Mounting Type="Surface Mount", Number of I/O=16, Oscillator Type=Internal, Peripherals="DMA, I²S, POR, PWM, WDT", Program Memory Size="32KB (32K x 8)", Program Memory Type=FLASH, RAM Size="6K x 8", Speed=48MHz, Supplier 1=Newark
U6: "RX TXRX MODULE BLE CHIP SMD", Current - Receiving=13mA, Frequency="2.402GHz ~ 2.48GHz", Operating Temperature="-20°C ~ 70°C", Package / Case="16-SMD Module", Power - Output=0dBm, Supplier Part Number 1=39AH3381, Voltage - Supply="1.9V ~ 3.6V", Antenna Type="Integrated, Chip", ComponentLink1Description=Datasheet, ComponentLink1URL=https://ww1.microchip.com/downloads/en/DeviceDoc/RN4870-71-Data-Sheet-DS50002489E.pdf, Current - Transmitting=13mA, Data Rate=10kbps, Modulation=GFSK, Mounting Type="Surface Mount", Protocol="Bluetooth v5.0", RF Family/Standard=Bluetooth, Sensitivity=-90dBm, Serial Interfaces="I²C, AIO, PIO, PWM, SPI, UART", Supplier 1=Newark, Utilized IC / Part=RN4871
U7: "IC SUPERVISOR 1 CHANNEL SOT23-3", Number of Voltages Monitored=1, Operating Temperature="-40°C ~ 85°C (TA)", Package / Case="TO-236-3, SC-59, SOT-23-3", Supplier Device Package=SOT-23-3, Supplier Part Number 1=497-3338-1-ND, Voltage - Threshold=2.93V, ComponentLink1Description=Datasheet, ComponentLink1URL=https://www.st.com/content/ccc/resource/technical/document/datasheet/cd/e2/ab/27/7d/5d/44/41/CD00003591.pdf/files/CD00003591.pdf/jcr:content/translations/en.CD00003591.pdf, Mounting Type="Surface Mount", Output="Push-Pull, Totem Pole", Reset="Active Low", Reset Timeout="140ms Minimum", Supplier 1=Digi-Key, TYPE="Simple Reset/Power-On Reset"
VR1: "IC REG LINEAR 3.3V 500MA 8SOP", Current - Output=500mA, Current - Quiescent (Iq)="550 µA", Operating Temperature="-40°C ~ 105°C", Package / Case="8-SOIC (0.173\", 4.40mm Width)", Supplier Device Package=8-SOP, Supplier Part Number 1=BD33KA5WF-E2CT-ND, Voltage - Input (Max)=5.5V, Voltage - Output (Min/Fixed)=3.3V, Voltage Dropout (Max)="0.2V @ 200mA", Control Features=Enable, Current - Supply (Max)="550 µA", Mounting Type="Surface Mount", Number of Regulators=1, Output Configuration=Positive, Output Type=Fixed, Protection Features="Over Current, Over Temperature", PSRR="50dB (120Hz)", Supplier 1=Digi-Key
XTAL1: "CRYSTAL 8.0000MHZ 20PF SMD", ESR (Equivalent Series Resistance)="60 Ohms", Frequency="8 MHz", Frequency Stability=±50ppm, Frequency Tolerance=±30ppm, Load Capacitance=20pF, Operating Mode=Fundamental, Operating Temperature="-10°C ~ 70°C", Package / Case=HC-49/US, ComponentLink1Description=Datasheet, ComponentLink1URL=https://ecsxtal.com/store/pdf/csm-7x.pdf, Height - Seated (Max)="0.169\" (4.30mm)", Mounting Type="Surface Mount", Size / Dimension="0.449\" L x 0.189\" W (11.40mm x 4.80mm)", TYPE="MHz Crystal"

## Free pads (board coordinates)
  round 250 hole 125: M(-1250,-1250) M(-1250,1250) M(1250,-1250) M(1250,1250)

## Via types
v1: diameter 50, hole 28, TOP SIGNAL to BOTTOM SIGNAL, 33 vias

## Nets (pads, with @x,y where several pads share a name; then routed paths per layer and width w, separated by ;. In a path a pad name is that pad's centre, name@x,y a point inside that pad or via, vN(x,y) a via of type N, cw(c..) or ccw(c..) an arc to the next point about the centre after c; other vN are vias at no path point)
BOOT_SELECT: U2.4 U4.1 | length 193.7
  TOP SIGNAL w10: U2.4 -245.59,-81.09 ccw(c-210.54,-81.09) -210.54,-116.14 U4.1
GND: C1.2 C2.2 C3.2 C4.2 C5.2 C6.2 C7.2 C8.2 C9.2 C10.2 C11.2 C12.2 C13.2 C14.2 C15.2 J1.2 J1.4 J1.6 J1.8 J1.10 J1.12 J1.14 J1.16 J1.18 J1.20 J2.5 J2.6 R1.2 S1.1 S2.1 U1.3 U2.3 U3.2 U4.15 U5.3 U6.2 U6.13 U7.1 VR1.6 VR1.7 | length 6247
  TOP SIGNAL w10: v1(-390,-1190) ccw(c-387.8,-1190) -387.8,-1192.2 U5.3 ; v1(-330,0) cw(c-292.2,0) -292.2,37.8 U2.3 ; U6.13 -49.76,-1310.24 cw(c-49.76,-1360) v1(0,-1360) ccw(c44.72,-1360) 44.72,-1404.72 U6.2 ; J2.6@-137.8,1423.78 -114.17,1423.78 -39.37,1423.78 39.37,1423.78 114.17,1423.78 J2.6@137.8,1423.78 ; U4.15 12.8,37.2 ccw(c50,37.2) v1(50,0) ; U7.1 cw(c352.76,-959.84) 350,-959.84 J1.4 cw(c350,-802.76) J1.4@352.76,-802.76
  BOTTOM SIGNAL w10: v1(-1040,688.27) C10.2 ; C5.2 -592.2,-44.94 cw(c-547.26,-44.94) -547.26,0 v1(-330,0) cw(c-330,-8.9) -321.1,-8.9 C11.2 -321.1,-535.39 cw(c-325.71,-535.39) C12.2 ; S1.1 -456.94,981.1 cw(c-456.94,947.63) -423.46,947.63 C4.2 ; U1.3 -285.31,969.69 cw(c-260,969.69) -260,995 v1(-215,995) -215,806.93 ccw(c-203.07,806.93) C3.2 ; v1(-65,1157.36) v1@-64.91,1157.36 ; C2.2 v1@-64.91,1157.36 ; v1(50,0) ccw(c50,40) 90,40 90,378.9 cw(c91.1,378.9) C7.2 C8.2 91.1,565.39 cw(c95.71,565.39) C9.2 ; v1(110,690) R1.2 ; U3.2 v1(190,1143.31) C1.2 ; VR1.7 VR1.6 -6.1,881.1 cw(c-6.1,939.91) -64.91,939.91 v1@-64.91,1157.36 ; C13.2 cw(c292.2,-283.9) 306.1,-283.9 C14.2 536.59,-330 cw(c536.59,-385.61) 592.2,-385.61 C6.2 592.2,-754.33 cw(c546.53,-754.33) 546.53,-800 J1.2 ; S2.1 762.2,1118.2 cw(c804,1118.2) 804,1160 C15.2
NetC1_1: C1.1 D1.2 VR1.1 | length 257.2
  BOTTOM SIGNAL w10: C1.1 VR1.1 D1.2
NetC2_1: C2.1 S3.1 U3.1 VR1.5 VR1.8 | length 686.9
  BOTTOM SIGNAL w10: C2.1 30,1010 ccw(c58.9,1010) 58.9,981.1 S3.1 ; U3.1 S3.1 ; VR1.5 281.1,831.1 ccw(c281.1,850) 300,850 300,956.1 ccw(c275,956.1) 275,981.1 VR1.8 S3.1
NetC5_1: C5.1 U4.2 XTAL1.1 | length 849
  TOP SIGNAL w10: v1(-450,-500) XTAL1.1 -190,-497.01 -190,-364.61 -190,-364.55 -190,-220 cw(c-170,-220) -170,-200 -110,-200 ccw(c-110,-179.57) -89.57,-179.57 U4.2
  BOTTOM SIGNAL w10: C5.1 v1(-450,-500)
NetC6_1: C6.1 U4.3 XTAL1.2 | length 1153.1
  TOP SIGNAL w10: U4.3 -63.98,-209.81 cw(c-84.17,-209.81) -84.17,-230 -140,-230 ccw(c-140,-250) -160,-250 -160,-340 ccw(c-140,-340) -140,-360 120,-360 cw(c120,-420) 180,-420 180,-492.99 ccw(c187.01,-492.99) XTAL1.2 v1(450,-500)
  BOTTOM SIGNAL w10: v1(450,-500) C6.1
NetC10_1: C10.1 D3.2 R3.2 U2.2 | length 2327.2
  TOP SIGNAL w10: v1(-1130,922.36) -1130,419.96 ccw(c-1090.04,419.96) -1090.04,380 -452.61,380 cw(c-452.61,347.39) -420,347.39 -420,158.41 ccw(c-381.59,158.41) -381.59,120 -240,120 cw(c-240,100) -220,100 U2.2
  BOTTOM SIGNAL w10: v1(-1130,922.36) C10.1 cw(c-1012.83,922.36) -1012.83,949.53 R3.2 -880,1030 cw(c-860,1030) -860,1050 -740,1050 cw(c-740,1030) -720,1030 D3.2
NetC15_1: C15.1 D4.2 R5.2 U5.2 | length 4179.6
  TOP SIGNAL w10: U5.2 -300,-1095.2 cw(c-274.8,-1095.2) -274.8,-1070 v1(-210,-1070)
  BOTTOM SIGNAL w10: v1(-210,-1070) 1130,-1070 ccw(c1130,-970) 1230,-970 1230,930 ccw(c1210.47,930) 1210.47,949.53 R5.2 ; D4.2 1119.53,970 cw(c1119.53,949.53) R5.2 ; C15.1 1093.4,1097.8 cw(c1093.4,1051.19) 1140,1051.19 R5.2
NetD2_2: D2.2 R1.1 | length 590
  BOTTOM SIGNAL w10: D2.2 R1.1
NetD3_1: D3.1 R2.1 R3.1 S1.2 | length 573.7
  BOTTOM SIGNAL w10: R3.1 -880,750 ccw(c-860,750) -860,730 -730,730 ccw(c-730,740) -720,740 ; R2.1 -720,740 ; S1.2 -707.48,800 cw(c-707.48,812.52) D3.1 -720,740
NetD4_1: D4.1 R4.1 R5.1 S2.2 | length 520.9
  BOTTOM SIGNAL w10: S2.2 957.48,800 ccw(c957.48,812.52) D4.1 ; R4.1 D4.1 ; R5.1 cw(c1119.53,832.99) 1119.53,812.52 D4.1
NetD5_2: D5.2 R6.1 | length 92.2
  BOTTOM SIGNAL w10: D5.2 R6.1
NetR6_2: R6.2 U6.12 | length 2445.2
  TOP SIGNAL w10: v1(-210,-1150) ccw(c-210,-1160) -220,-1160 -220,-1237.63 ccw(c-194.64,-1237.63) -194.64,-1262.99 U6.12
  BOTTOM SIGNAL w10: v1(-210,-1150) -259.2,-1150 cw(c-259.2,-1109.2) -300,-1109.2 -300,-972.38 cw(c-257.62,-972.38) -257.62,-930 653.68,-930 ccw(c653.68,-873.68) 710,-873.68 710,-152.75 ccw(c657.25,-152.75) 657.25,-100 R6.2
NetU6_10: U6.10 U7.2 | length 571.1
  TOP SIGNAL w10: U6.10 -70.87,-1068.11 cw(c-40.15,-1068.11) -40.15,-1037.4 U7.2
RESET: C11.1 C12.1 J1.15 U4.4 | length 788.3
  TOP SIGNAL w10: v1(-100,-295) -60.85,-295 ccw(c-60.85,-272.54) -38.39,-272.54 U4.4
  BOTTOM SIGNAL w10: J1.15 cw(c-250,-695.71) -254.29,-695.71 C12.1 cw(c-254.29,-535.39) -258.9,-535.39 C11.1 -258.9,-321.88 cw(c-232.01,-321.88) -232.01,-295 v1(-100,-295)
SHORT_DETECT: J3.1 U4.12 | length 1639
  TOP SIGNAL w10: U4.12 89.57,203.6 cw(c135.97,203.6) 135.97,250 468.44,250 cw(c468.44,198.44) 520,198.44 520,13.32 ccw(c572.69,13.32) 572.69,-39.37 J3.1
SWCLK: J1.9 U4.20 | length 1292.4
  TOP SIGNAL w10: v1(-190,220) -190,137.56 ccw(c-168.58,137.56) -168.58,116.14 U4.20
  BOTTOM SIGNAL w10: v1(-190,220) -190,-135.38 ccw(c-145.38,-135.38) -145.38,-180 8.05,-180 cw(c8.05,-221.95) 50,-221.95 J1.9
SWDIO: J1.7 U4.19 | length 1317.4
  TOP SIGNAL w10: v1(-110,220) cw(c-110,199.57) -89.57,199.57 U4.19
  BOTTOM SIGNAL w10: v1(-110,220) -110,170 cw(c-140,170) -140,140 ccw(c-140,110) -170,110 -170,-130 ccw(c-140,-130) -140,-160 11.37,-160 cw(c11.37,-218.63) 70,-218.63 70,-510 ccw(c110,-510) 110,-550 cw(c110,-590) 150,-590 J1.7
SYS_CONFIG_IN: U5.4 U6.16 | length 606.6
  TOP SIGNAL w10: U5.4 -442.03,-1267.8 ccw(c-442.03,-1295.76) -470,-1295.76 -470,-1422.58 ccw(c-442.58,-1422.58) -442.58,-1450 -169.29,-1450 cw(c-169.29,-1451.97) U6.16
UART_CTS: U4.6 U6.11 | length 2931.6
  TOP SIGNAL w10: U6.11 -118.11,-1014.1 cw(c-84.01,-1014.1) -84.01,-980 v1(230,-980) ; U4.6 ccw(c12.8,-118.94) 10,-118.94 10,-242.76 ccw(c27.24,-242.76) 27.24,-260 870,-260 cw(c870,-280) 890,-280 890,-958.25 cw(c868.25,-958.25) 868.25,-980 v1(670,-980)
  BOTTOM SIGNAL w10: v1(230,-980) v1(670,-980)
UART_RTS: U4.7 U6.9 | length 2845.2
  TOP SIGNAL w10: U6.9 -23.62,-1103.62 cw(c-10,-1103.62) -10,-1090 882.55,-1090 ccw(c882.55,-1062.55) 910,-1062.55 910,-280 ccw(c870,-280) 870,-240 55,-240 cw(c55,-223.39) 38.39,-223.39 U4.7
UART_RX: U4.9 U6.7 | length 2747.2
  TOP SIGNAL w10: U6.7 70.87,-1140 cw(c80.87,-1140) 80.87,-1130 882.7,-1130 ccw(c882.7,-1062.7) 950,-1062.7 950,-280.39 ccw(c869.61,-280.39) 869.61,-200 105,-200 cw(c105,-184.57) 89.57,-184.57 U4.9
UART_RX_IND: U4.10 U6.6 | length 2700.6
  TOP SIGNAL w10: U4.10 115.16,-170 ccw(c125.16,-170) 125.16,-180 870.1,-180 cw(c870.1,-279.9) 970,-279.9 970,-1064.92 cw(c884.92,-1064.92) 884.92,-1150 128.11,-1150 ccw(c128.11,-1160) 118.11,-1160 U6.6
UART_TX: U4.8 U6.8 | length 2795.7
  TOP SIGNAL w10: U6.8 23.62,-1120 cw(c33.62,-1120) 33.62,-1110 884.56,-1110 ccw(c884.56,-1064.56) 930,-1064.56 930,-280 ccw(c870,-280) 870,-220 85,-220 cw(c85,-198.98) 63.98,-198.98 U4.8
UART_TX_IND: U4.11 U6.15 | length 3636.1
  TOP SIGNAL w10: v1(-270,-1404.72) U6.15 ; v1(-150,360) 190,360 cw(c190,330) v1(220,330) ; U4.11 115.16,167.71 cw(c137.44,167.71) 137.44,190 v1(190,190)
  BOTTOM SIGNAL w10: v1(-270,-1404.72) -718.92,-1404.72 cw(c-718.92,-1343.32) -780.32,-1343.32 -780.32,292.51 cw(c-712.84,292.51) -712.84,360 v1(-150,360) ; v1(190,190) ccw(c190,220) 220,220 v1(220,330)
USB_5V_IN: J2.1 S3.2 | length 719
  TOP SIGNAL w17: J2.1 51.18,1151.18 cw(c0,1151.18) 0,1100 ccw(c0,1050) -50,1050 -50,843.05 ccw(c-6.95,843.05) -6.95,800 S3.2
USB_D_PROT_N: C3.1 U1.4 U4.17 | length 1138.3
  TOP SIGNAL w10: v1(-236.53,550) -280,550 ccw(c-280,526.73) -303.27,526.73 -303.27,333.27 ccw(c-260,333.27) -260,290 -86.7,290 cw(c-86.7,241.69) -38.39,241.69 U4.17
  BOTTOM SIGNAL w10: U1.4 -304.68,932.94 -304.68,829.68 ccw(c-270,829.68) C3.1 -270,583.47 ccw(c-236.53,583.47) v1(-236.53,550)
USB_D_PROT_P: C4.1 U1.5 U4.18 | length 1128.1
  TOP SIGNAL w10: v1(-390,550) -350,550 cw(c-350,523.27) -323.27,523.27 -323.27,333.27 ccw(c-260,333.27) -260,270 -95.24,270 cw(c-95.24,238.73) -63.98,238.73 U4.18
  BOTTOM SIGNAL w10: v1(-390,550) ccw(c-390,583.46) -356.54,583.46 C4.1 ccw(c-356.54,826.85) -324.69,826.85 U1.5
USB_D_UNPROT_N: J2.2 U1.2 | length 615.3
  TOP SIGNAL w10: v1(-275,1125) -275,1187.73 cw(c-252.73,1187.73) -252.73,1210 -17.2,1210 ccw(c-17.2,1250) 22.8,1250 22.8,1314.68 cw(c25.59,1314.68) J2.2
  BOTTOM SIGNAL w10: U1.2 -305,1095 cw(c-275,1095) v1(-275,1125)
USB_D_UNPROT_P: J2.3 U1.1 | length 673.1
  TOP SIGNAL w10: v1(-355,1125) -355,1182.37 cw(c-307.37,1182.37) -307.37,1230 -17.2,1230 ccw(c-17.2,1250) 2.8,1250 2.8,1314.68 ccw(c0,1314.68) J2.3
  BOTTOM SIGNAL w10: v1(-355,1125) cw(c-355,1094.68) -325.05,1099.36 cw(c-334.93,1097.85) -324.94,1097.37 ccw(c-275,1095) -325,1095 U1.1@-325,992
VCC: C7.1 C8.1 C9.1 C13.1 C14.1 D1.1 D2.1 D5.1 J1.1 J3.2 R2.2 R4.2 U2.5 U4.5 U4.16 U5.5 U6.14 U7.3 | length 3084.1
  TOP SIGNAL w10: U5.5 -274.41,-1304.41 cw(c-300,-1304.41) -300,-1330 -362.52,-1330 ccw(c-362.52,-1357.48) v1(-390,-1357.48) U6.14 ; U2.5 -87.8,-37.8 ccw(c-87.8,0) v1(-50,0) ; U4.5 -12.8,-275.23 ccw(c11.97,-275.23) 11.97,-300 v1(160,-300) ; U4.16 -12.8,217.2 cw(c30,217.2) v1(30,260) ; U7.3 524.39,-1000 ccw(c524.39,-964.39) 560,-964.39 560,-732.86 ccw(c527.14,-732.86) 527.14,-700 J1.1
  BOTTOM SIGNAL w10: C9.1 cw(c24.29,565.39) 28.9,565.39 C8.1 C7.1 28.9,261.1 ccw(c30,261.1) v1(30,260) ; v1(160,-300) 213.9,-300 cw(c213.9,-330) C14.1 243.9,-283.9 cw(c257.8,-283.9) C13.1 ; D1.1 v1(650,868.9) 650,616.29 ccw(c694.55,616.29) 694.55,571.73 R4.2
  BOTTOM SIGNAL w15: v1(-1040,571.73) R2.2
pads on no net: J1.3 J1.5 J1.11 J1.13 J1.17 J1.19 J2.4 U2.1 U4.13 U4.14 U5.1 U6.1 U6.3 U6.4 U6.5 VR1.2 VR1.3 VR1.4

## Polygon pours and split planes (outlines as drawn)
VCC on POWER (split plane): 1262.9,1479.63 1275.75,1478.54 1288.52,1476.74 1301.18,1474.22 1313.67,1471 1325.96,1467.08 1338.01,1462.48 1349.79,1457.21 1361.25,1451.29 1372.36,1444.74 1383.09,1437.57 1393.4,1429.81 1403.25,1421.49 1412.63,1412.63 1421.49,1403.25 1429.81,1393.4 1437.57,1383.09 1444.74,1372.36 1451.29,1361.25 1457.21,1349.79 1462.48,1338.01 1467.08,1325.96 1471,1313.67 1474.22,1301.18 1476.74,1288.52 1478.54,1275.75 1479.63,1262.9 1479.97,1250.69 1479.9,1250 1479.9,-1250 1479.97,-1250.69 1479.63,-1262.9 1478.54,-1275.75 1476.74,-1288.52 1474.22,-1301.18 1471,-1313.67 1467.08,-1325.96 1462.48,-1338.01 1457.21,-1349.79 1451.29,-1361.25 1444.74,-1372.36 1437.57,-1383.09 1429.81,-1393.4 1421.49,-1403.25 1412.63,-1412.63 1403.25,-1421.49 1393.4,-1429.81 1383.09,-1437.57 1372.36,-1444.74 1361.25,-1451.29 1349.79,-1457.21 1338.01,-1462.48 1325.96,-1467.08 1313.67,-1471 1301.18,-1474.22 1288.52,-1476.74 1275.75,-1478.54 1262.9,-1479.63 1250.69,-1479.97 1250,-1479.9 -1250,-1479.9 -1250.69,-1479.97 -1262.9,-1479.63 -1275.75,-1478.54 -1288.52,-1476.74 -1301.18,-1474.22 -1313.67,-1471 -1325.96,-1467.08 -1338.01,-1462.48 -1349.79,-1457.21 -1361.25,-1451.29 -1372.36,-1444.74 -1383.09,-1437.57 -1393.4,-1429.81 -1403.25,-1421.49 -1412.63,-1412.63 -1421.49,-1403.25 -1429.81,-1393.4 -1437.57,-1383.09 -1444.74,-1372.36 -1451.29,-1361.25 -1457.21,-1349.79 -1462.48,-1338.01 -1467.08,-1325.96 -1471,-1313.67 -1474.22,-1301.18 -1476.74,-1288.52 -1478.54,-1275.75 -1479.63,-1262.9 -1479.97,-1250.69 -1479.9,-1250 -1479.9,1250 -1479.97,1250.69 -1479.63,1262.9 -1478.54,1275.75 -1476.74,1288.52 -1474.22,1301.18 -1471,1313.67 -1467.08,1325.96 -1462.48,1338.01 -1457.21,1349.79 -1451.29,1361.25 -1444.74,1372.36 -1437.57,1383.09 -1429.81,1393.4 -1421.49,1403.25 -1412.63,1412.63 -1403.25,1421.49 -1393.4,1429.81 -1383.09,1437.57 -1372.36,1444.74 -1361.25,1451.29 -1349.79,1457.21 -1338.01,1462.48 -1325.96,1467.08 -1313.67,1471 -1301.18,1474.22 -1288.52,1476.74 -1275.75,1478.54 -1262.9,1479.63 -1250.69,1479.97 -1250,1479.9 1250,1479.9 1250.69,1479.97
GND on GROUND (split plane): 1262.9,1479.63 1275.75,1478.54 1288.52,1476.74 1301.18,1474.22 1313.67,1471 1325.96,1467.08 1338.01,1462.48 1349.79,1457.21 1361.25,1451.29 1372.36,1444.74 1383.09,1437.57 1393.4,1429.81 1403.25,1421.49 1412.63,1412.63 1421.49,1403.25 1429.81,1393.4 1437.57,1383.09 1444.74,1372.36 1451.29,1361.25 1457.21,1349.79 1462.48,1338.01 1467.08,1325.96 1471,1313.67 1474.22,1301.18 1476.74,1288.52 1478.54,1275.75 1479.63,1262.9 1479.97,1250.69 1479.9,1250 1479.9,-1250 1479.97,-1250.69 1479.63,-1262.9 1478.54,-1275.75 1476.74,-1288.52 1474.22,-1301.18 1471,-1313.67 1467.08,-1325.96 1462.48,-1338.01 1457.21,-1349.79 1451.29,-1361.25 1444.74,-1372.36 1437.57,-1383.09 1429.81,-1393.4 1421.49,-1403.25 1412.63,-1412.63 1403.25,-1421.49 1393.4,-1429.81 1383.09,-1437.57 1372.36,-1444.74 1361.25,-1451.29 1349.79,-1457.21 1338.01,-1462.48 1325.96,-1467.08 1313.67,-1471 1301.18,-1474.22 1288.52,-1476.74 1275.75,-1478.54 1262.9,-1479.63 1250.69,-1479.97 1250,-1479.9 -1250,-1479.9 -1250.69,-1479.97 -1262.9,-1479.63 -1275.75,-1478.54 -1288.52,-1476.74 -1301.18,-1474.22 -1313.67,-1471 -1325.96,-1467.08 -1338.01,-1462.48 -1349.79,-1457.21 -1361.25,-1451.29 -1372.36,-1444.74 -1383.09,-1437.57 -1393.4,-1429.81 -1403.25,-1421.49 -1412.63,-1412.63 -1421.49,-1403.25 -1429.81,-1393.4 -1437.57,-1383.09 -1444.74,-1372.36 -1451.29,-1361.25 -1457.21,-1349.79 -1462.48,-1338.01 -1467.08,-1325.96 -1471,-1313.67 -1474.22,-1301.18 -1476.74,-1288.52 -1478.54,-1275.75 -1479.63,-1262.9 -1479.97,-1250.69 -1479.9,-1250 -1479.9,1250 -1479.97,1250.69 -1479.63,1262.9 -1478.54,1275.75 -1476.74,1288.52 -1474.22,1301.18 -1471,1313.67 -1467.08,1325.96 -1462.48,1338.01 -1457.21,1349.79 -1451.29,1361.25 -1444.74,1372.36 -1437.57,1383.09 -1429.81,1393.4 -1421.49,1403.25 -1412.63,1412.63 -1403.25,1421.49 -1393.4,1429.81 -1383.09,1437.57 -1372.36,1444.74 -1361.25,1451.29 -1349.79,1457.21 -1338.01,1462.48 -1325.96,1467.08 -1313.67,1471 -1301.18,1474.22 -1288.52,1476.74 -1275.75,1478.54 -1262.9,1479.63 -1250.69,1479.97 -1250,1479.9 1250,1479.9 1250.69,1479.97

## Silkscreen, mask and mechanical layers (free items; w line width, h text height)
Top Overlay:
  text "University of Florida" at -1231.54,460 h80 r90
  text "Bluetooth Status Board" at -1230.44,-219.93 h80 r90
  text "Machine Intelligence Lab" at -1231.54,-949.93 h80 r90
Mechanical 1:
  lines w10: -1250,-1000 -1000,-1250 1000,-1250 1250,-1000 1250,1000 1000,1250 -1000,1250 -1250,1000 -1250,-1000

## Text inside footprints (layer, text, board x,y; h text height)
D2: Top Overlay "+" at 177.25,70.01 h60
D5: Top Overlay "+" at 177.25,-129.99 h60